# EAGLE board ESP32_Thing_Plus_UFL-Panel (EAGLE 9.6.2), part 1 of 5
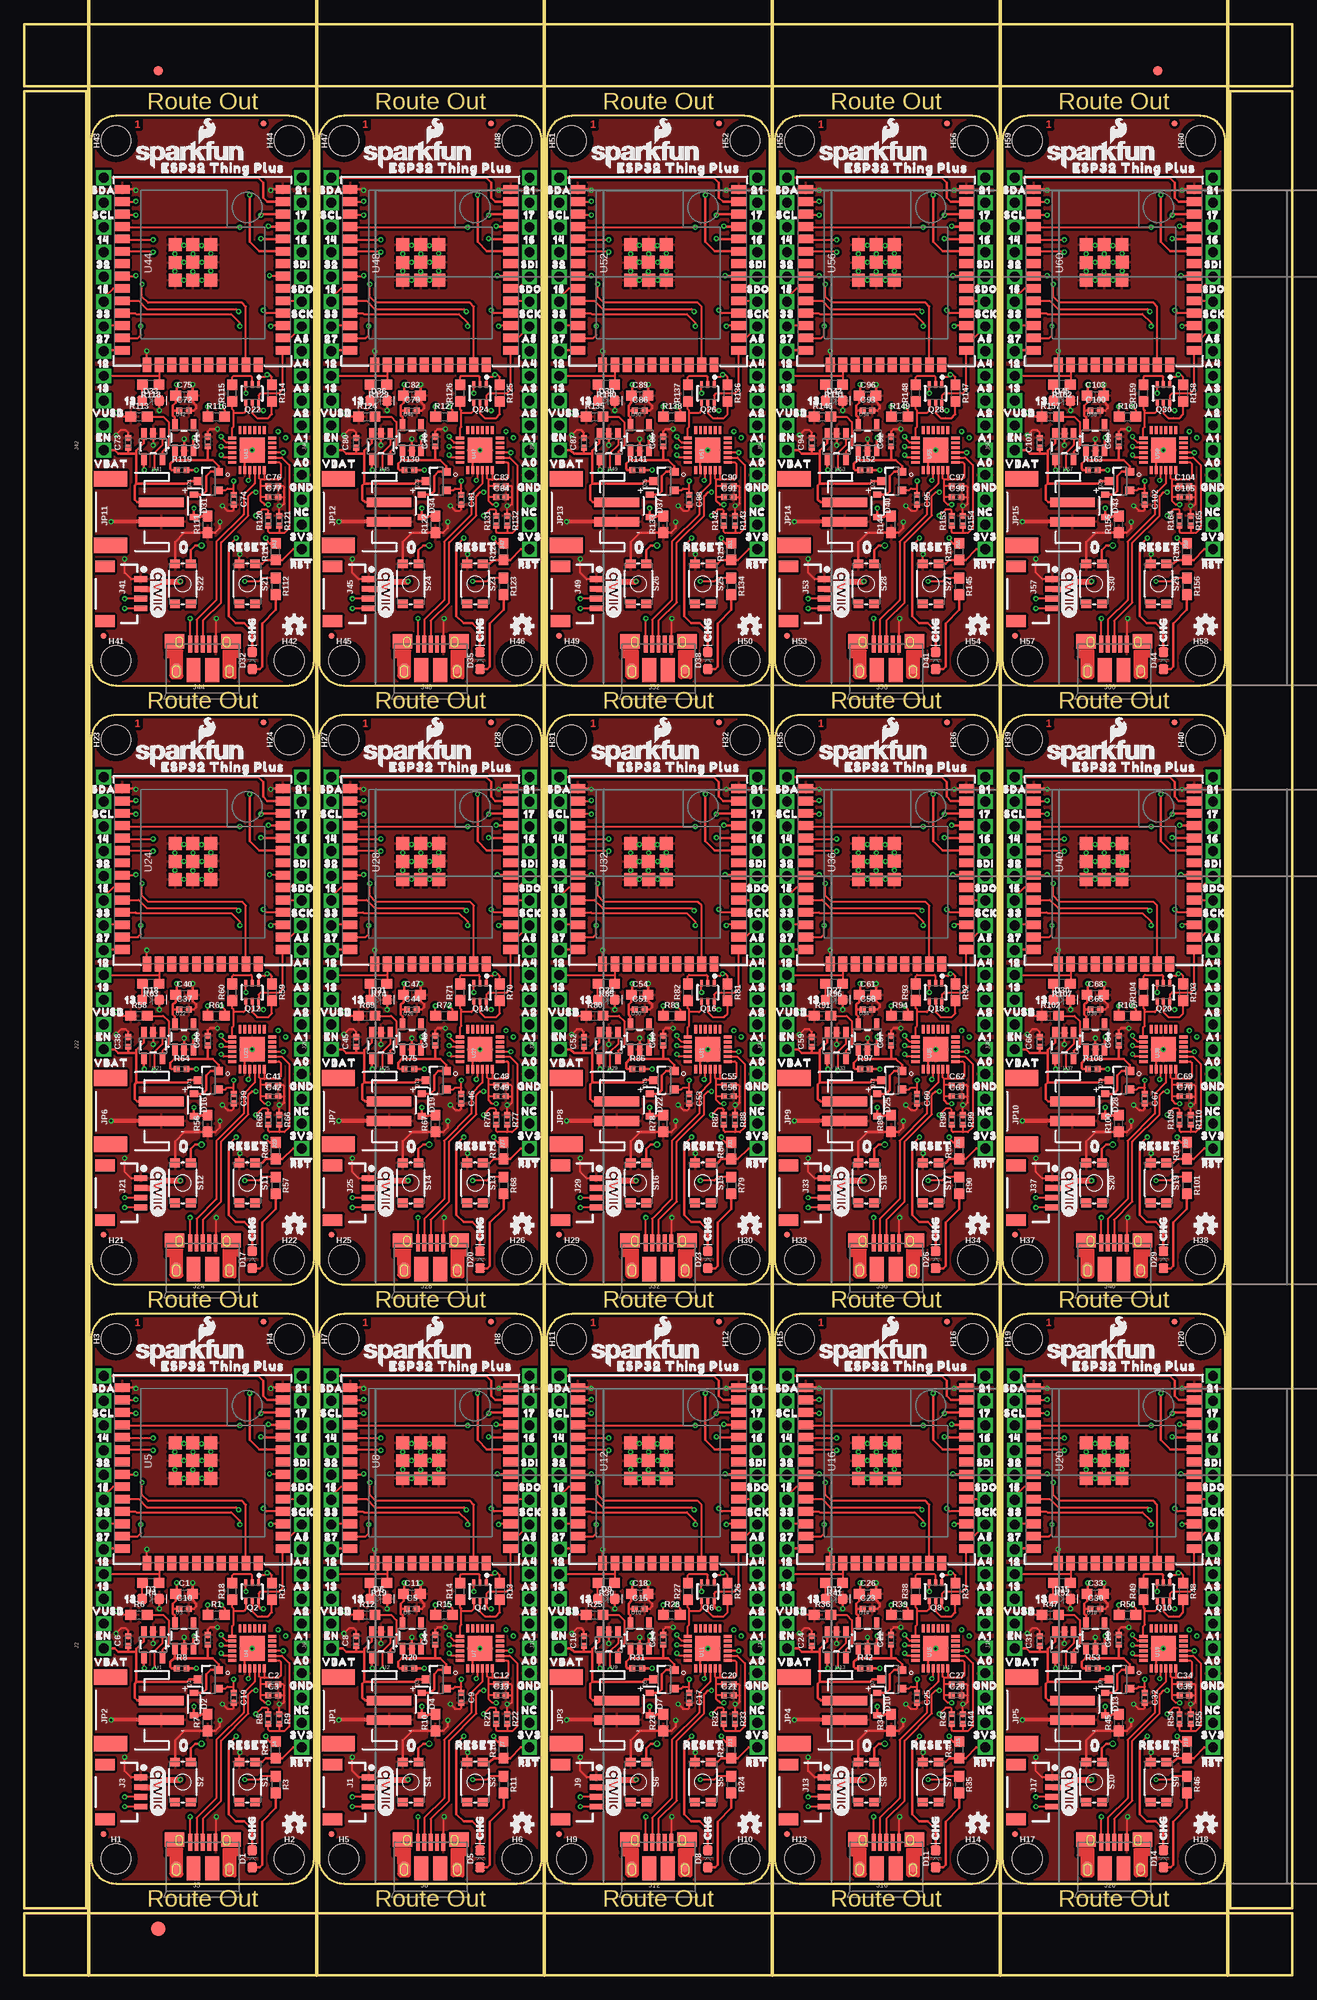
[diagram p0: board, top side]
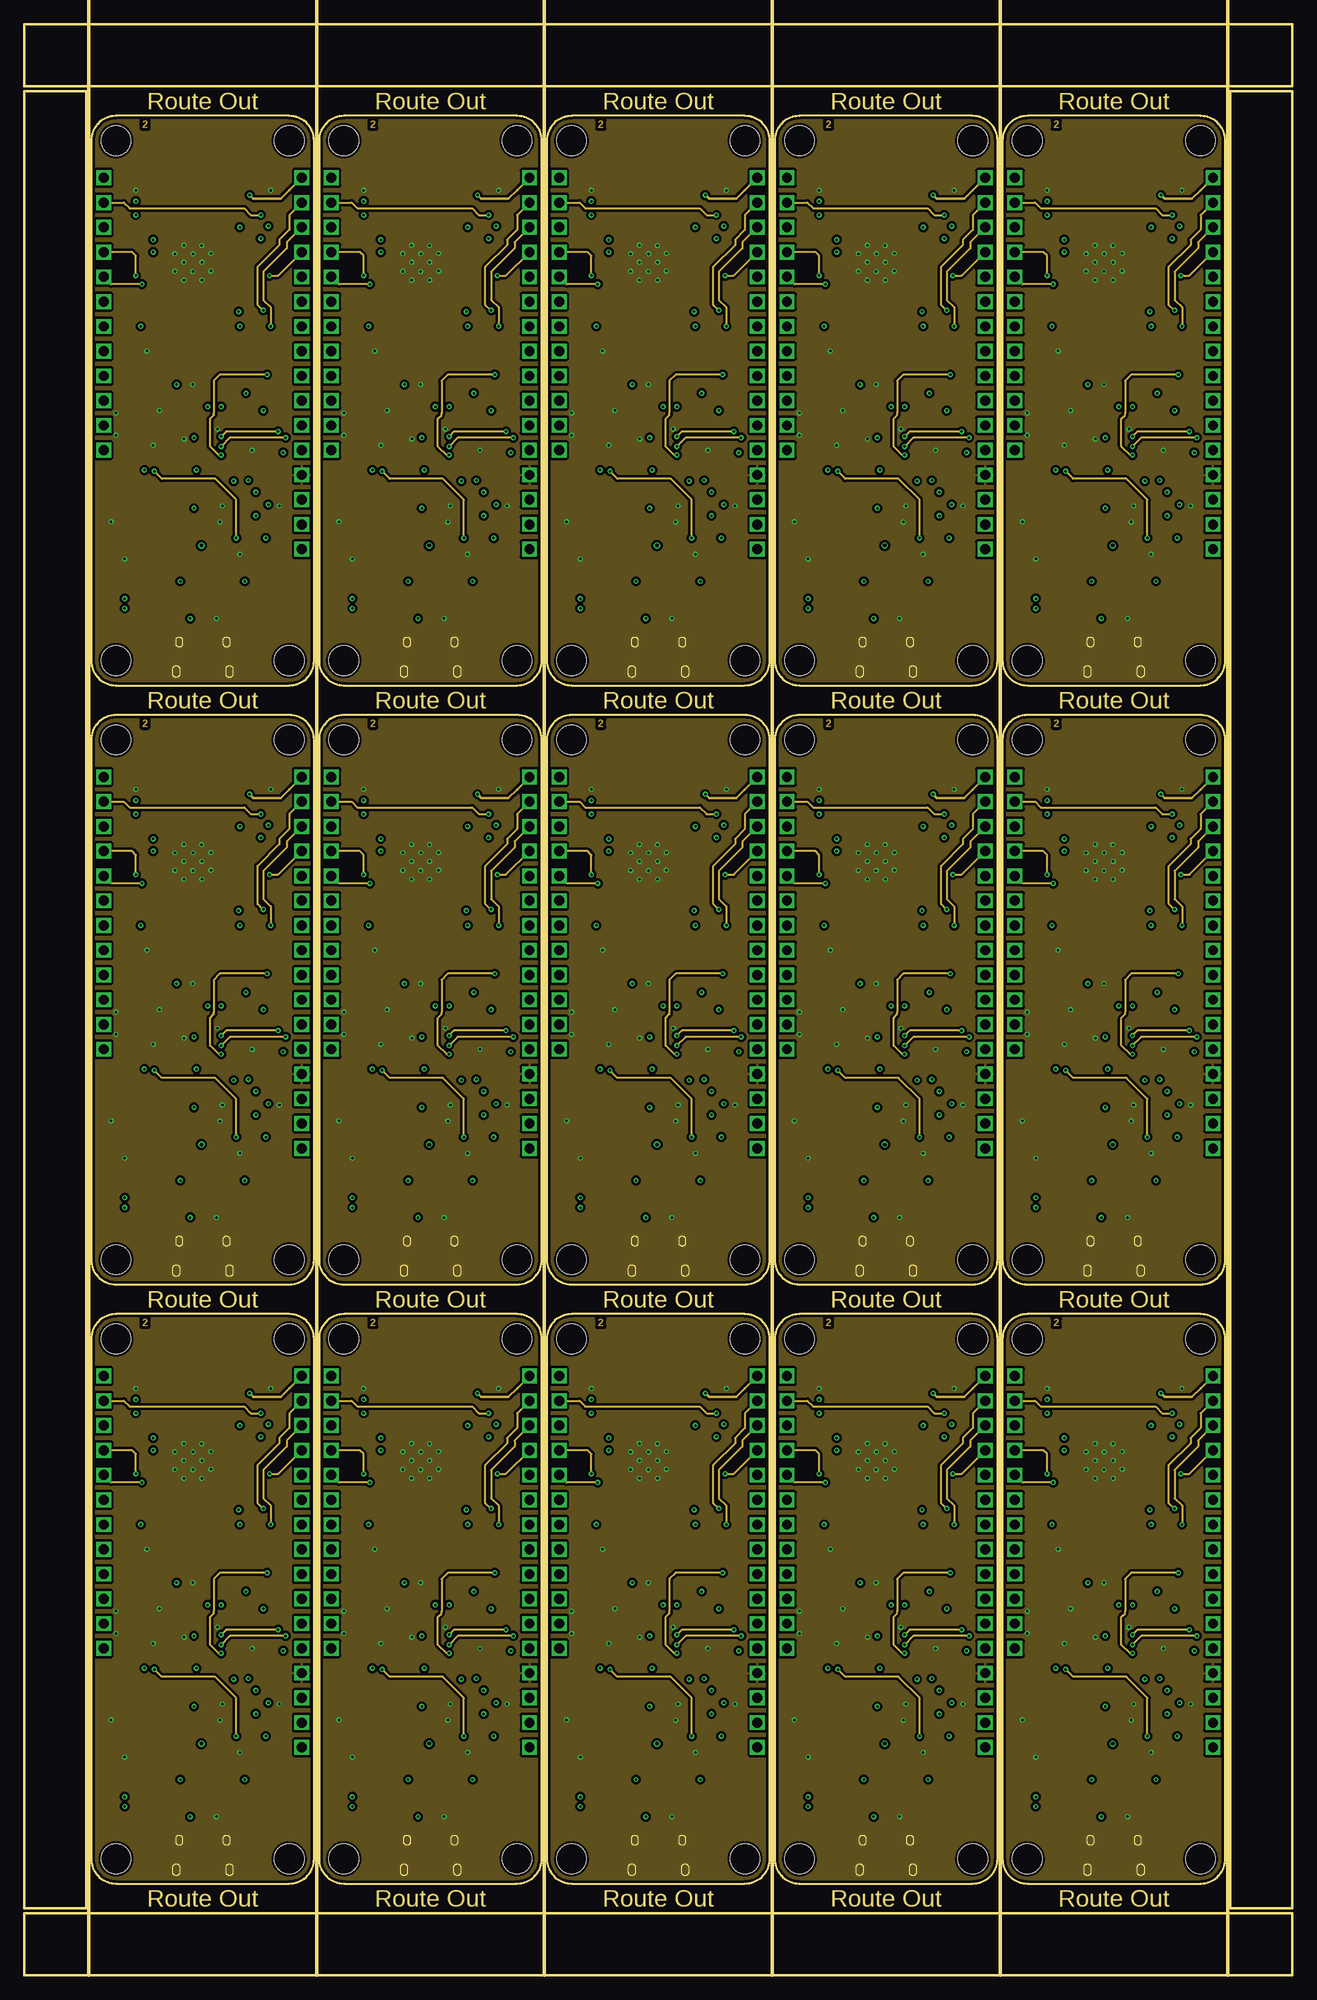
[diagram p1: board, inner layer Route2]
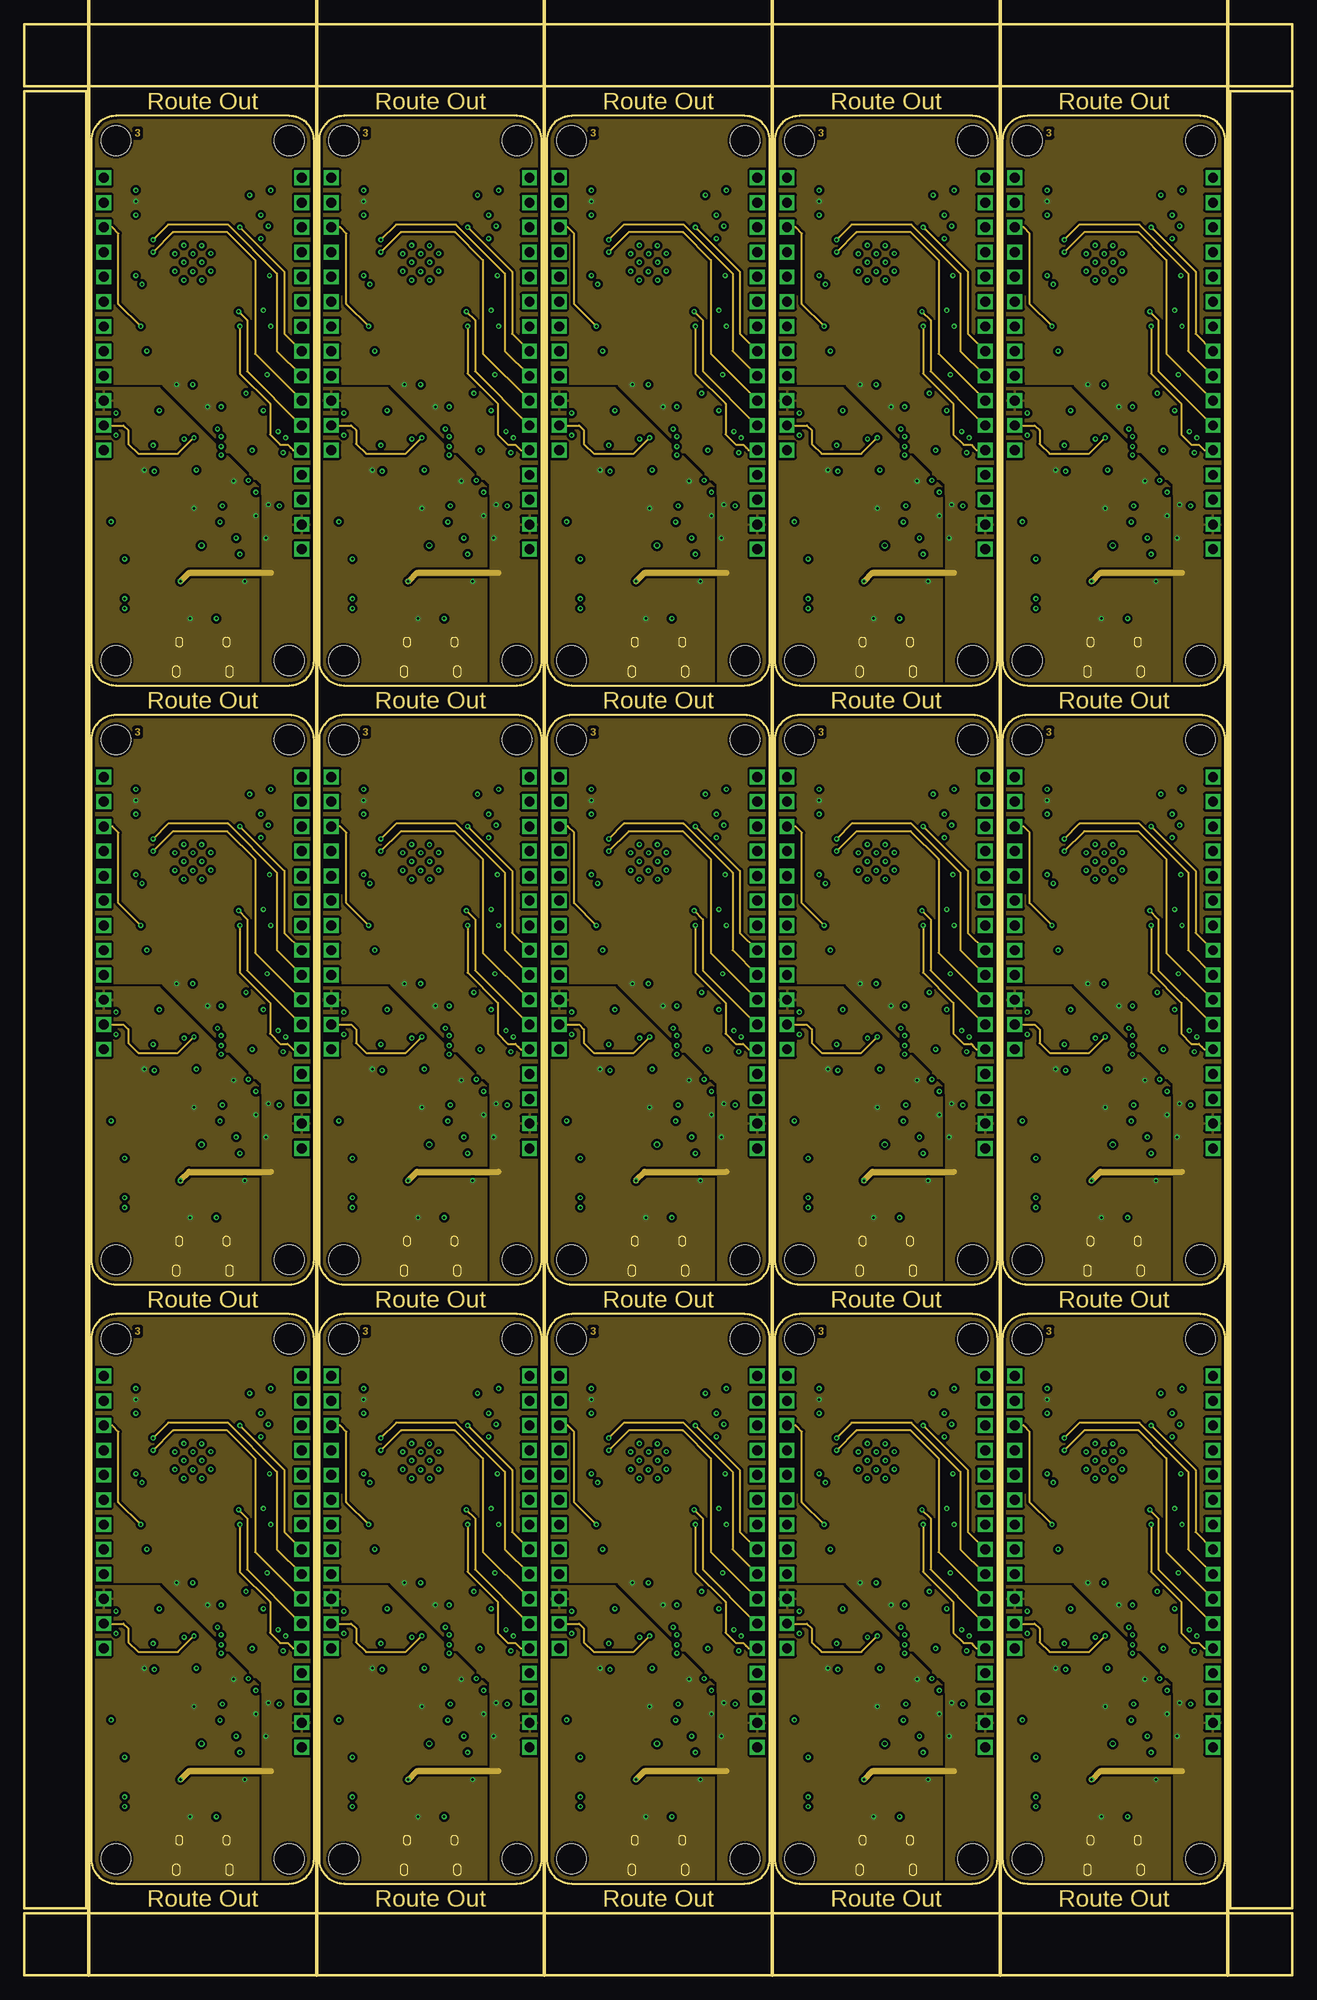
[diagram p2: board, inner layer Route15]
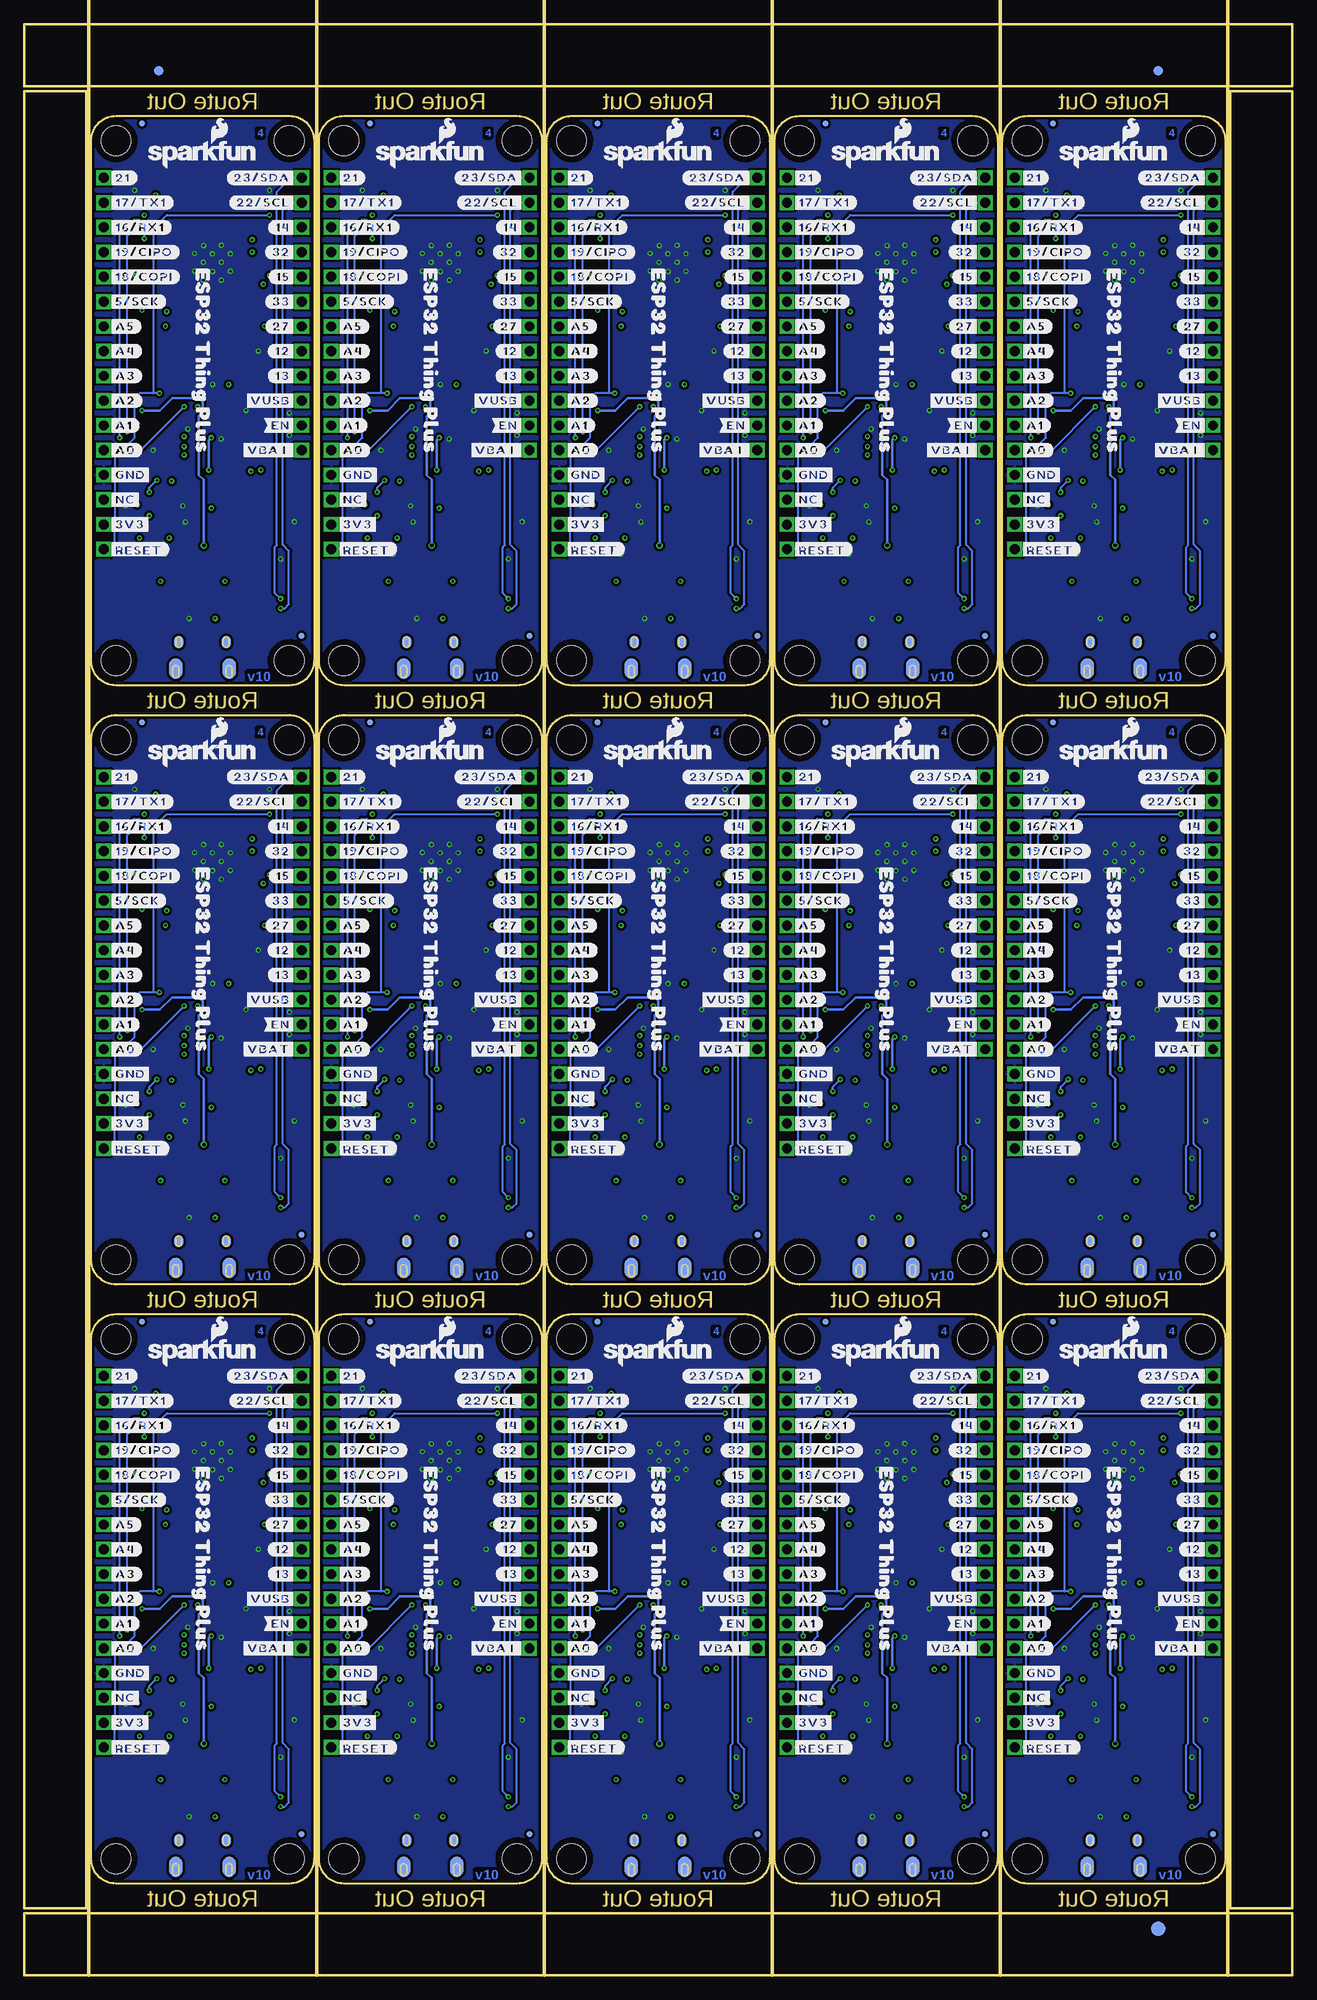
[diagram p3: board, bottom side, seen from below]

Size 130.05 x 200.15 mm. Coordinates in mm from the lower left corner, seen from the top.
Outline: 29.72,11.94 29.72,65.28 arc90 27.18,67.82 9.4,67.82 arc90 6.86,65.28 6.86,11.94 arc90 9.4,9.4 27.18,9.4 arc90 29.72,11.94
Outline: 53.09,11.94 53.09,65.28 arc90 50.55,67.82 32.77,67.82 arc90 30.23,65.28 30.23,11.94 arc90 32.77,9.4 50.55,9.4 arc90 53.09,11.94
Outline: 76.45,11.94 76.45,65.28 arc90 73.91,67.82 56.13,67.82 arc90 53.59,65.28 53.59,11.94 arc90 56.13,9.4 73.91,9.4 arc90 76.45,11.94
Outline: 99.82,11.94 99.82,65.28 arc90 97.28,67.82 79.5,67.82 arc90 76.96,65.28 76.96,11.94 arc90 79.5,9.4 97.28,9.4 arc90 99.82,11.94
Outline: 123.19,11.94 123.19,65.28 arc90 120.65,67.82 102.87,67.82 arc90 100.33,65.28 100.33,11.94 arc90 102.87,9.4 120.65,9.4 arc90 123.19,11.94
Outline: 29.72,73.41 29.72,126.75 arc90 27.18,129.29 9.4,129.29 arc90 6.86,126.75 6.86,73.41 arc90 9.4,70.87 27.18,70.87 arc90 29.72,73.41
Outline: 53.09,73.41 53.09,126.75 arc90 50.55,129.29 32.77,129.29 arc90 30.23,126.75 30.23,73.41 arc90 32.77,70.87 50.55,70.87 arc90 53.09,73.41
Outline: 76.45,73.41 76.45,126.75 arc90 73.91,129.29 56.13,129.29 arc90 53.59,126.75 53.59,73.41 arc90 56.13,70.87 73.91,70.87 arc90 76.45,73.41
Outline: 99.82,73.41 99.82,126.75 arc90 97.28,129.29 79.5,129.29 arc90 76.96,126.75 76.96,73.41 arc90 79.5,70.87 97.28,70.87 arc90 99.82,73.41
Outline: 123.19,73.41 123.19,126.75 arc90 120.65,129.29 102.87,129.29 arc90 100.33,126.75 100.33,73.41 arc90 102.87,70.87 120.65,70.87 arc90 123.19,73.41
Outline: 29.72,134.87 29.72,188.21 arc90 27.18,190.75 9.4,190.75 arc90 6.86,188.21 6.86,134.87 arc90 9.4,132.33 27.18,132.33 arc90 29.72,134.87
Outline: 53.09,134.87 53.09,188.21 arc90 50.55,190.75 32.77,190.75 arc90 30.23,188.21 30.23,134.87 arc90 32.77,132.33 50.55,132.33 arc90 53.09,134.87
Outline: 76.45,134.87 76.45,188.21 arc90 73.91,190.75 56.13,190.75 arc90 53.59,188.21 53.59,134.87 arc90 56.13,132.33 73.91,132.33 arc90 76.45,134.87
Outline: 99.82,134.87 99.82,188.21 arc90 97.28,190.75 79.5,190.75 arc90 76.96,188.21 76.96,134.87 arc90 79.5,132.33 97.28,132.33 arc90 99.82,134.87
Outline: 123.19,134.87 123.19,188.21 arc90 120.65,190.75 102.87,190.75 arc90 100.33,188.21 100.33,134.87 arc90 102.87,132.33 120.65,132.33 arc90 123.19,134.87
Outline: 0,6.35 130.05,6.35 130.05,0 0,0 0,6.35
Outline: 123.7,193.29 130.05,193.29 130.05,6.86 123.7,6.86 123.7,193.29
Outline: 0,200.15 130.05,200.15 130.05,193.8 0,193.8 0,200.15
Outline: 0,193.29 6.35,193.29 6.35,6.86 0,6.86 0,193.29
Copper layers (1*2*15*16): Top 0.035559375mm / dielectric 0.47751875mm / Route2 0.035559375mm / dielectric 0.47751875mm / Route15 0.035559375mm / dielectric 0.47751875mm / Bottom 0.035559375mm
Design rules "ESP32_Thing_Plus_UFL": minimum track width 4mil, minimum drill 6mil, track to track 5mil, track to pad 5mil, pad to pad 5mil, via to via 5mil, smd to smd 5mil, copper to edge 4mil, drill to drill 4mil, minimum pad ring 5mil, minimum via ring 5mil, stop-mask expansion 4mil, vias tented up to drill 25mil, thermal gap 10mil
Milling: 6 lines

## Footprints (pad centres in the part's own frame; a part is rotated, then mirrored left to right if it is on the bottom)
0603 = smd 1.1 x 1: 1 -0.85,0; 2 0.85,0
0402-TIGHT = smd 0.6 x 0.6: 1 -0.5,0; 2 0.5,0
LED-0603 = smd 1 x 1: A -0.877,0; C 0.877,0
SOD-323 = smd 0.63 x 0.83: A 1.15,0; C -1.15,0
FIDUCIAL-1X2 = smd 1 x 1: 1 0,0
FIDUCIAL-1.5X3 = smd 1.5 x 1.5: 1 0,0
FIDUCIAL-MICRO = smd 0.635 x 0.635: 1 0,0
STAND-OFF-TIGHT = hole 3.048: 0,0
1X04_1MM_RA = smd 0.6 x 1.35: 1 -1.5,0; 2 -0.5,0; 3 0.5,0; 4 1.5,0 | smd 1.2 x 2: NC1 2.8,-3.675; NC2 -2.8,-3.675
1X12_SM_SQ_NOSILK = drill 1.016 pad 1.27 square: 1 0,0; 2 2.54,0; 3 5.08,0; 4 7.62,0; 5 10.16,0; 6 12.7,0; 7 15.24,0; 8 17.78,0; 9 20.32,0; 10 22.86,0; 11 25.4,0; 12 27.94,0
1X16_SM_SQ_NOSILK = drill 1.016 pad 1.27 square: 1 0,0; 2 2.54,0; 3 5.08,0; 4 7.62,0; 5 10.16,0; 6 12.7,0; 7 15.24,0; 8 17.78,0; 9 20.32,0; 10 22.86,0; 11 25.4,0; 12 27.94,0; 13 30.48,0; 14 33.02,0; 15 35.56,0; 16 38.1,0
USB-MICROB-PTH-MILL = smd 0.4 x 1.75: D+ 0,0; D- -0.65,0; GND 1.3,0; ID 0.65,0; VBUS -1.3,0 | smd 2 x 1.46: SHIELD -2.9,0.275; SHIELD2 2.9,0.275 | smd 1.425 x 2.5: SHIELD3 -0.963,-2.675; SHIELD4 0.963,-2.675 | smd 1.4 x 2.1 bottom: SHIELD5 -2.731,-2.531; SHIELD7 2.729,-2.531 | smd 1 x 1: SHIELD6 2.7,-2.575 | smd 1.1 x 1.5: SHIELD8 -2.731,-2.731 | smd 1 x 1.3 bottom: SHIELD9 -2.43,0.195; SHIELD10 2.43,0.195
JST-2-SMD = smd 1 x 4.6: 1 -1,-3.7; 2 1,-3.7 | smd 1.6 x 3.4: NC1 -3.4,1.5; NC2 3.4,1.5
SOT23-3@1 = smd 0.8 x 0.9: 1 -0.95,-1; 2 0.95,-1; 3 0,1.1
SC70-6 = smd 0.3 x 0.66: 1 -0.65,-0.92; 2 0,-0.92; 3 0.65,-0.92; 4 0.65,0.92; 5 0,0.92; 6 -0.65,0.92
TACTILE_SWITCH_SMD_4.6X2.8MM = smd 0.9 x 1: 1 -2.05,-0.8; 2 2.05,-0.8; 3 2.05,0.8; 4 -2.05,0.8
TP_15TH = drill 0.381 pad 0.61: P$1 0,0
SOT23-5 = smd 0.55 x 1.2: 1 -0.95,-1.3; 2 0,-1.3; 3 0.95,-1.3; 4 0.95,1.3; 5 -0.95,1.3
QFN24 = smd 0.85 x 0.3: 1 -2.05,1.25; 2 -2.05,0.75; 3 -2.05,0.25; 4 -2.05,-0.25; 5 -2.05,-0.75; 6 -2.05,-1.25; 13 2.05,-1.25; 14 2.05,-0.75; 15 2.05,-0.25; 16 2.05,0.25; 17 2.05,0.75; 18 2.05,1.25 | smd 0.3 x 0.85: 7 -1.25,-2.05; 8 -0.75,-2.05; 9 -0.25,-2.05; 10 0.25,-2.05; 11 0.75,-2.05; 12 1.25,-2.05; 19 1.25,2.05; 20 0.75,2.05; 21 0.25,2.05; 22 -0.25,2.05; 23 -0.75,2.05; 24 -1.25,2.05 | smd 2.55 x 2.55: PAD 0,0
ESP-WROOM-32EU-NARROW = smd 0.9 x 1.5: 1 6.43,8.238; 2 5.16,8.238; 3 3.89,8.238; 4 2.62,8.238; 5 1.35,8.238; 6 0.08,8.238; 7 -1.19,8.238; 8 -2.46,8.238; 9 -3.73,8.238; 10 -5,8.238; 11 -6.27,8.238; 12 -7.54,8.238; 13 -8.81,8.238; 14 -10.08,8.238; 25 -10.08,-8.238; 26 -8.81,-8.238; 27 -7.54,-8.238; 28 -6.27,-8.238; 29 -5,-8.238; 30 -3.73,-8.238; 31 -2.46,-8.238; 32 -1.19,-8.238; 33 0.08,-8.238; 34 1.35,-8.238; 35 2.62,-8.238; 36 3.89,-8.238; 37 5.16,-8.238; 38 6.43,-8.238 | smd 1.5 x 0.9: 15 -11.57,5.715; 16 -11.57,4.445; 17 -11.57,3.175; 18 -11.57,1.905; 19 -11.57,0.635; 20 -11.57,-0.635; 21 -11.57,-1.905; 22 -11.57,-3.175; 23 -11.57,-4.445; 24 -11.57,-5.715 | smd 1.33 x 1.33: GND -1.051,1.015; P$1 0.77,-0.83; P$2 0.77,1; P$3 0.77,2.83; P$4 -1.06,2.83; P$5 -1.03,-0.84; P$6 -2.89,-0.83; P$7 -2.9,1; P$8 -2.89,2.83

## Placement (x,y rotation side)
C1  10uF  [0603]  16.38,39.12 0 top
C2  0.1uF  [0402-TIGHT]  25.53,29.84 0 top
C3  4.7uF  [0402-TIGHT]  25.53,28.7 0 top
C4  1.0uF  [0402-TIGHT]  42.16,34.42 90 top
C5  1.0uF  [0402-TIGHT]  39.75,37.59 0 top
C6  4.7uF  [0402-TIGHT]  10.67,34.29 90 top
C7  1.0uF  [0402-TIGHT]  18.8,34.42 90 top
C8  4.7uF  [0402-TIGHT]  34.04,34.29 90 top
C9  4.7uF  [0402-TIGHT]  44.83,28.45 270 top
C10  1.0uF  [0402-TIGHT]  16.38,37.59 0 top
C11  10uF  [0603]  39.75,39.12 0 top
C12  0.1uF  [0402-TIGHT]  48.89,29.84 0 top
C13  4.7uF  [0402-TIGHT]  48.89,28.7 0 top
C14  1.0uF  [0402-TIGHT]  65.53,34.42 90 top
C15  1.0uF  [0402-TIGHT]  63.12,37.59 0 top
C16  4.7uF  [0402-TIGHT]  57.4,34.29 90 top
C17  4.7uF  [0402-TIGHT]  68.2,28.45 270 top
C18  10uF  [0603]  63.12,39.12 0 top
C19  4.7uF  [0402-TIGHT]  21.46,28.45 270 top
C20  0.1uF  [0402-TIGHT]  72.26,29.84 0 top
C21  4.7uF  [0402-TIGHT]  72.26,28.7 0 top
C22  1.0uF  [0402-TIGHT]  88.9,34.42 90 top
C23  1.0uF  [0402-TIGHT]  86.49,37.59 0 top
C24  4.7uF  [0402-TIGHT]  80.77,34.29 90 top
C25  4.7uF  [0402-TIGHT]  91.57,28.45 270 top
C26  10uF  [0603]  86.49,39.12 0 top
C27  0.1uF  [0402-TIGHT]  95.63,29.84 0 top
C28  4.7uF  [0402-TIGHT]  95.63,28.7 0 top
C29  1.0uF  [0402-TIGHT]  112.27,34.42 90 top
C30  1.0uF  [0402-TIGHT]  109.86,37.59 0 top
C31  4.7uF  [0402-TIGHT]  104.14,34.29 90 top
C32  4.7uF  [0402-TIGHT]  114.94,28.45 270 top
C33  10uF  [0603]  109.86,39.12 0 top
C34  0.1uF  [0402-TIGHT]  119,29.84 0 top
C35  4.7uF  [0402-TIGHT]  119,28.7 0 top
C36  1.0uF  [0402-TIGHT]  18.8,95.88 90 top
C37  1.0uF  [0402-TIGHT]  16.38,99.06 0 top
C38  4.7uF  [0402-TIGHT]  10.67,95.76 90 top
C39  4.7uF  [0402-TIGHT]  21.46,89.92 270 top
C40  10uF  [0603]  16.38,100.58 0 top
C41  0.1uF  [0402-TIGHT]  25.53,91.31 0 top
C42  4.7uF  [0402-TIGHT]  25.53,90.17 0 top
C43  1.0uF  [0402-TIGHT]  42.16,95.88 90 top
C44  1.0uF  [0402-TIGHT]  39.75,99.06 0 top
C45  4.7uF  [0402-TIGHT]  34.04,95.76 90 top
C46  4.7uF  [0402-TIGHT]  44.83,89.92 270 top
C47  10uF  [0603]  39.75,100.58 0 top
C48  0.1uF  [0402-TIGHT]  48.89,91.31 0 top
C49  4.7uF  [0402-TIGHT]  48.89,90.17 0 top
C50  1.0uF  [0402-TIGHT]  65.53,95.88 90 top
C51  1.0uF  [0402-TIGHT]  63.12,99.06 0 top
C52  4.7uF  [0402-TIGHT]  57.4,95.76 90 top
C53  4.7uF  [0402-TIGHT]  68.2,89.92 270 top
C54  10uF  [0603]  63.12,100.58 0 top
C55  0.1uF  [0402-TIGHT]  72.26,91.31 0 top
C56  4.7uF  [0402-TIGHT]  72.26,90.17 0 top
C57  1.0uF  [0402-TIGHT]  88.9,95.88 90 top
C58  1.0uF  [0402-TIGHT]  86.49,99.06 0 top
C59  4.7uF  [0402-TIGHT]  80.77,95.76 90 top
C60  4.7uF  [0402-TIGHT]  91.57,89.92 270 top
C61  10uF  [0603]  86.49,100.58 0 top
C62  0.1uF  [0402-TIGHT]  95.63,91.31 0 top
C63  4.7uF  [0402-TIGHT]  95.63,90.17 0 top
C64  1.0uF  [0402-TIGHT]  112.27,95.88 90 top
C65  1.0uF  [0402-TIGHT]  109.86,99.06 0 top
C66  4.7uF  [0402-TIGHT]  104.14,95.76 90 top
C67  4.7uF  [0402-TIGHT]  114.94,89.92 270 top
C68  10uF  [0603]  109.86,100.58 0 top
C69  0.1uF  [0402-TIGHT]  119,91.31 0 top
C70  4.7uF  [0402-TIGHT]  119,90.17 0 top
C71  1.0uF  [0402-TIGHT]  18.8,157.35 90 top
C72  1.0uF  [0402-TIGHT]  16.38,160.53 0 top
C73  4.7uF  [0402-TIGHT]  10.67,157.23 90 top
C74  4.7uF  [0402-TIGHT]  21.46,151.38 270 top
C75  10uF  [0603]  16.38,162.05 0 top
C76  0.1uF  [0402-TIGHT]  25.53,152.78 0 top
C77  4.7uF  [0402-TIGHT]  25.53,151.64 0 top
C78  1.0uF  [0402-TIGHT]  42.16,157.35 90 top
C79  1.0uF  [0402-TIGHT]  39.75,160.53 0 top
C80  4.7uF  [0402-TIGHT]  34.04,157.23 90 top
C81  4.7uF  [0402-TIGHT]  44.83,151.38 270 top
C82  10uF  [0603]  39.75,162.05 0 top
C83  0.1uF  [0402-TIGHT]  48.89,152.78 0 top
C84  4.7uF  [0402-TIGHT]  48.89,151.64 0 top
C85  1.0uF  [0402-TIGHT]  65.53,157.35 90 top
C86  1.0uF  [0402-TIGHT]  63.12,160.53 0 top
C87  4.7uF  [0402-TIGHT]  57.4,157.23 90 top
C88  4.7uF  [0402-TIGHT]  68.2,151.38 270 top
C89  10uF  [0603]  63.12,162.05 0 top
C90  0.1uF  [0402-TIGHT]  72.26,152.78 0 top
C91  4.7uF  [0402-TIGHT]  72.26,151.64 0 top
C92  1.0uF  [0402-TIGHT]  88.9,157.35 90 top
C93  1.0uF  [0402-TIGHT]  86.49,160.53 0 top
C94  4.7uF  [0402-TIGHT]  80.77,157.23 90 top
C95  4.7uF  [0402-TIGHT]  91.57,151.38 270 top
C96  10uF  [0603]  86.49,162.05 0 top
C97  0.1uF  [0402-TIGHT]  95.63,152.78 0 top
C98  4.7uF  [0402-TIGHT]  95.63,151.64 0 top
C99  1.0uF  [0402-TIGHT]  112.27,157.35 90 top
C100  1.0uF  [0402-TIGHT]  109.86,160.53 0 top
C101  4.7uF  [0402-TIGHT]  104.14,157.23 90 top
C102  4.7uF  [0402-TIGHT]  114.94,151.38 270 top
C103  10uF  [0603]  109.86,162.05 0 top
C104  0.1uF  [0402-TIGHT]  119,152.78 0 top
C105  4.7uF  [0402-TIGHT]  119,151.64 0 top
D1  Yellow  [LED-0603]  23.37,11.94 90 top
D2  1A/23V/620mV  [SOD-323]  17.4,27.81 270 top
D3  BLUE  [LED-0603]  12.95,38.61 0 top
D4  1A/23V/620mV  [SOD-323]  40.77,27.81 270 top
D5  Yellow  [LED-0603]  46.74,11.94 90 top
D6  BLUE  [LED-0603]  36.32,38.61 0 top
D7  1A/23V/620mV  [SOD-323]  64.14,27.81 270 top
D8  Yellow  [LED-0603]  70.1,11.94 90 top
D9  BLUE  [LED-0603]  59.69,38.61 0 top
D10  1A/23V/620mV  [SOD-323]  87.5,27.81 270 top
D11  Yellow  [LED-0603]  93.47,11.94 90 top
D12  BLUE  [LED-0603]  83.06,38.61 0 top
D13  1A/23V/620mV  [SOD-323]  110.87,27.81 270 top
D14  Yellow  [LED-0603]  116.84,11.94 90 top
D15  BLUE  [LED-0603]  106.43,38.61 0 top
D16  1A/23V/620mV  [SOD-323]  17.4,89.28 270 top
D17  Yellow  [LED-0603]  23.37,73.41 90 top
D18  BLUE  [LED-0603]  12.95,100.08 0 top
D19  1A/23V/620mV  [SOD-323]  40.77,89.28 270 top
D20  Yellow  [LED-0603]  46.74,73.41 90 top
D21  BLUE  [LED-0603]  36.32,100.08 0 top
D22  1A/23V/620mV  [SOD-323]  64.14,89.28 270 top
D23  Yellow  [LED-0603]  70.1,73.41 90 top
D24  BLUE  [LED-0603]  59.69,100.08 0 top
D25  1A/23V/620mV  [SOD-323]  87.5,89.28 270 top
D26  Yellow  [LED-0603]  93.47,73.41 90 top
D27  BLUE  [LED-0603]  83.06,100.08 0 top
D28  1A/23V/620mV  [SOD-323]  110.87,89.28 270 top
D29  Yellow  [LED-0603]  116.84,73.41 90 top
D30  BLUE  [LED-0603]  106.43,100.08 0 top
D31  1A/23V/620mV  [SOD-323]  17.4,150.75 270 top
D32  Yellow  [LED-0603]  23.37,134.87 90 top
D33  BLUE  [LED-0603]  12.95,161.54 0 top
D34  1A/23V/620mV  [SOD-323]  40.77,150.75 270 top
D35  Yellow  [LED-0603]  46.74,134.87 90 top
D36  BLUE  [LED-0603]  36.32,161.54 0 top
D37  1A/23V/620mV  [SOD-323]  64.14,150.75 270 top
D38  Yellow  [LED-0603]  70.1,134.87 90 top
D39  BLUE  [LED-0603]  59.69,161.54 0 top
D40  1A/23V/620mV  [SOD-323]  87.5,150.75 270 top
D41  Yellow  [LED-0603]  93.47,134.87 90 top
D42  BLUE  [LED-0603]  83.06,161.54 0 top
D43  1A/23V/620mV  [SOD-323]  110.87,150.75 270 top
D44  Yellow  [LED-0603]  116.84,134.87 90 top
D45  BLUE  [LED-0603]  106.43,161.54 0 top
E$1  [FIDUCIAL-1X2]  13.72,195.39 0 top
E$2  [FIDUCIAL-1X2]  13.72,195.39 0 bottom
E$3  [FIDUCIAL-1X2]  116.27,195.39 0 top
E$4  [FIDUCIAL-1X2]  116.27,195.39 0 bottom
E$5  [FIDUCIAL-1.5X3]  13.72,4.76 0 top
E$6  [FIDUCIAL-1.5X3]  13.72,4.76 0 bottom
FD1  FIDUCIALUFIDUCIAL  [FIDUCIAL-MICRO]  24.51,67.06 0 top
FD2  FIDUCIALUFIDUCIAL  [FIDUCIAL-MICRO]  24.51,67.06 0 bottom
FD3  FIDUCIALUFIDUCIAL  [FIDUCIAL-MICRO]  8.13,14.48 0 top
FD4  FIDUCIALUFIDUCIAL  [FIDUCIAL-MICRO]  8.13,14.48 0 bottom
FD5  FIDUCIALUFIDUCIAL  [FIDUCIAL-MICRO]  47.88,67.06 0 top
FD6  FIDUCIALUFIDUCIAL  [FIDUCIAL-MICRO]  47.88,67.06 0 bottom
FD7  FIDUCIALUFIDUCIAL  [FIDUCIAL-MICRO]  31.5,14.48 0 top
FD8  FIDUCIALUFIDUCIAL  [FIDUCIAL-MICRO]  31.5,14.48 0 bottom
FD9  FIDUCIALUFIDUCIAL  [FIDUCIAL-MICRO]  71.25,67.06 0 top
FD10  FIDUCIALUFIDUCIAL  [FIDUCIAL-MICRO]  71.25,67.06 0 bottom
FD11  FIDUCIALUFIDUCIAL  [FIDUCIAL-MICRO]  54.86,14.48 0 top
FD12  FIDUCIALUFIDUCIAL  [FIDUCIAL-MICRO]  54.86,14.48 0 bottom
FD13  FIDUCIALUFIDUCIAL  [FIDUCIAL-MICRO]  94.62,67.06 0 top
FD14  FIDUCIALUFIDUCIAL  [FIDUCIAL-MICRO]  94.62,67.06 0 bottom
FD15  FIDUCIALUFIDUCIAL  [FIDUCIAL-MICRO]  78.23,14.48 0 top
FD16  FIDUCIALUFIDUCIAL  [FIDUCIAL-MICRO]  78.23,14.48 0 bottom
FD17  FIDUCIALUFIDUCIAL  [FIDUCIAL-MICRO]  117.98,67.06 0 top
FD18  FIDUCIALUFIDUCIAL  [FIDUCIAL-MICRO]  117.98,67.06 0 bottom
FD19  FIDUCIALUFIDUCIAL  [FIDUCIAL-MICRO]  101.6,14.48 0 top
FD20  FIDUCIALUFIDUCIAL  [FIDUCIAL-MICRO]  101.6,14.48 0 bottom
FD21  FIDUCIALUFIDUCIAL  [FIDUCIAL-MICRO]  24.51,128.52 0 top
FD22  FIDUCIALUFIDUCIAL  [FIDUCIAL-MICRO]  24.51,128.52 0 bottom
FD23  FIDUCIALUFIDUCIAL  [FIDUCIAL-MICRO]  8.13,75.95 0 top
FD24  FIDUCIALUFIDUCIAL  [FIDUCIAL-MICRO]  8.13,75.95 0 bottom
FD25  FIDUCIALUFIDUCIAL  [FIDUCIAL-MICRO]  47.88,128.52 0 top
FD26  FIDUCIALUFIDUCIAL  [FIDUCIAL-MICRO]  47.88,128.52 0 bottom
FD27  FIDUCIALUFIDUCIAL  [FIDUCIAL-MICRO]  31.5,75.95 0 top
FD28  FIDUCIALUFIDUCIAL  [FIDUCIAL-MICRO]  31.5,75.95 0 bottom
FD29  FIDUCIALUFIDUCIAL  [FIDUCIAL-MICRO]  71.25,128.52 0 top
FD30  FIDUCIALUFIDUCIAL  [FIDUCIAL-MICRO]  71.25,128.52 0 bottom
FD31  FIDUCIALUFIDUCIAL  [FIDUCIAL-MICRO]  54.86,75.95 0 top
FD32  FIDUCIALUFIDUCIAL  [FIDUCIAL-MICRO]  54.86,75.95 0 bottom
FD33  FIDUCIALUFIDUCIAL  [FIDUCIAL-MICRO]  94.62,128.52 0 top
FD34  FIDUCIALUFIDUCIAL  [FIDUCIAL-MICRO]  94.62,128.52 0 bottom
FD35  FIDUCIALUFIDUCIAL  [FIDUCIAL-MICRO]  78.23,75.95 0 top
FD36  FIDUCIALUFIDUCIAL  [FIDUCIAL-MICRO]  78.23,75.95 0 bottom
FD37  FIDUCIALUFIDUCIAL  [FIDUCIAL-MICRO]  117.98,128.52 0 top
FD38  FIDUCIALUFIDUCIAL  [FIDUCIAL-MICRO]  117.98,128.52 0 bottom
FD39  FIDUCIALUFIDUCIAL  [FIDUCIAL-MICRO]  101.6,75.95 0 top
FD40  FIDUCIALUFIDUCIAL  [FIDUCIAL-MICRO]  101.6,75.95 0 bottom
FD41  FIDUCIALUFIDUCIAL  [FIDUCIAL-MICRO]  24.51,189.99 0 top
FD42  FIDUCIALUFIDUCIAL  [FIDUCIAL-MICRO]  24.51,189.99 0 bottom
FD43  FIDUCIALUFIDUCIAL  [FIDUCIAL-MICRO]  8.13,137.41 0 top
FD44  FIDUCIALUFIDUCIAL  [FIDUCIAL-MICRO]  8.13,137.41 0 bottom
FD45  FIDUCIALUFIDUCIAL  [FIDUCIAL-MICRO]  47.88,189.99 0 top
FD46  FIDUCIALUFIDUCIAL  [FIDUCIAL-MICRO]  47.88,189.99 0 bottom
FD47  FIDUCIALUFIDUCIAL  [FIDUCIAL-MICRO]  31.5,137.41 0 top
FD48  FIDUCIALUFIDUCIAL  [FIDUCIAL-MICRO]  31.5,137.41 0 bottom
FD49  FIDUCIALUFIDUCIAL  [FIDUCIAL-MICRO]  71.25,189.99 0 top
FD50  FIDUCIALUFIDUCIAL  [FIDUCIAL-MICRO]  71.25,189.99 0 bottom
FD51  FIDUCIALUFIDUCIAL  [FIDUCIAL-MICRO]  54.86,137.41 0 top
FD52  FIDUCIALUFIDUCIAL  [FIDUCIAL-MICRO]  54.86,137.41 0 bottom
FD53  FIDUCIALUFIDUCIAL  [FIDUCIAL-MICRO]  94.62,189.99 0 top
FD54  FIDUCIALUFIDUCIAL  [FIDUCIAL-MICRO]  94.62,189.99 0 bottom
FD55  FIDUCIALUFIDUCIAL  [FIDUCIAL-MICRO]  78.23,137.41 0 top
FD56  FIDUCIALUFIDUCIAL  [FIDUCIAL-MICRO]  78.23,137.41 0 bottom
FD57  FIDUCIALUFIDUCIAL  [FIDUCIAL-MICRO]  117.98,189.99 0 top
FD58  FIDUCIALUFIDUCIAL  [FIDUCIAL-MICRO]  117.98,189.99 0 bottom
FD59  FIDUCIALUFIDUCIAL  [FIDUCIAL-MICRO]  101.6,137.41 0 top
FD60  FIDUCIALUFIDUCIAL  [FIDUCIAL-MICRO]  101.6,137.41 0 bottom
H1  STAND-OFFTIGHT  [STAND-OFF-TIGHT]  9.4,11.94 0 top
H2  STAND-OFFTIGHT  [STAND-OFF-TIGHT]  27.18,11.94 0 top
H3  STAND-OFFTIGHT  [STAND-OFF-TIGHT]  9.4,65.28 90 top
H4  STAND-OFFTIGHT  [STAND-OFF-TIGHT]  27.18,65.28 90 top
H5  STAND-OFFTIGHT  [STAND-OFF-TIGHT]  32.77,11.94 0 top
H6  STAND-OFFTIGHT  [STAND-OFF-TIGHT]  50.55,11.94 0 top
H7  STAND-OFFTIGHT  [STAND-OFF-TIGHT]  32.77,65.28 90 top
H8  STAND-OFFTIGHT  [STAND-OFF-TIGHT]  50.55,65.28 90 top
H9  STAND-OFFTIGHT  [STAND-OFF-TIGHT]  56.13,11.94 0 top
H10  STAND-OFFTIGHT  [STAND-OFF-TIGHT]  73.91,11.94 0 top
H11  STAND-OFFTIGHT  [STAND-OFF-TIGHT]  56.13,65.28 90 top
H12  STAND-OFFTIGHT  [STAND-OFF-TIGHT]  73.91,65.28 90 top
H13  STAND-OFFTIGHT  [STAND-OFF-TIGHT]  79.5,11.94 0 top
H14  STAND-OFFTIGHT  [STAND-OFF-TIGHT]  97.28,11.94 0 top
H15  STAND-OFFTIGHT  [STAND-OFF-TIGHT]  79.5,65.28 90 top
H16  STAND-OFFTIGHT  [STAND-OFF-TIGHT]  97.28,65.28 90 top
H17  STAND-OFFTIGHT  [STAND-OFF-TIGHT]  102.87,11.94 0 top
H18  STAND-OFFTIGHT  [STAND-OFF-TIGHT]  120.65,11.94 0 top
H19  STAND-OFFTIGHT  [STAND-OFF-TIGHT]  102.87,65.28 90 top
H20  STAND-OFFTIGHT  [STAND-OFF-TIGHT]  120.65,65.28 90 top
H21  STAND-OFFTIGHT  [STAND-OFF-TIGHT]  9.4,73.41 0 top
H22  STAND-OFFTIGHT  [STAND-OFF-TIGHT]  27.18,73.41 0 top
H23  STAND-OFFTIGHT  [STAND-OFF-TIGHT]  9.4,126.75 90 top
H24  STAND-OFFTIGHT  [STAND-OFF-TIGHT]  27.18,126.75 90 top
H25  STAND-OFFTIGHT  [STAND-OFF-TIGHT]  32.77,73.41 0 top
H26  STAND-OFFTIGHT  [STAND-OFF-TIGHT]  50.55,73.41 0 top
H27  STAND-OFFTIGHT  [STAND-OFF-TIGHT]  32.77,126.75 90 top
H28  STAND-OFFTIGHT  [STAND-OFF-TIGHT]  50.55,126.75 90 top
H29  STAND-OFFTIGHT  [STAND-OFF-TIGHT]  56.13,73.41 0 top
H30  STAND-OFFTIGHT  [STAND-OFF-TIGHT]  73.91,73.41 0 top
H31  STAND-OFFTIGHT  [STAND-OFF-TIGHT]  56.13,126.75 90 top
H32  STAND-OFFTIGHT  [STAND-OFF-TIGHT]  73.91,126.75 90 top
H33  STAND-OFFTIGHT  [STAND-OFF-TIGHT]  79.5,73.41 0 top
H34  STAND-OFFTIGHT  [STAND-OFF-TIGHT]  97.28,73.41 0 top
H35  STAND-OFFTIGHT  [STAND-OFF-TIGHT]  79.5,126.75 90 top
H36  STAND-OFFTIGHT  [STAND-OFF-TIGHT]  97.28,126.75 90 top
H37  STAND-OFFTIGHT  [STAND-OFF-TIGHT]  102.87,73.41 0 top
H38  STAND-OFFTIGHT  [STAND-OFF-TIGHT]  120.65,73.41 0 top
H39  STAND-OFFTIGHT  [STAND-OFF-TIGHT]  102.87,126.75 90 top
H40  STAND-OFFTIGHT  [STAND-OFF-TIGHT]  120.65,126.75 90 top
H41  STAND-OFFTIGHT  [STAND-OFF-TIGHT]  9.4,134.87 0 top
H42  STAND-OFFTIGHT  [STAND-OFF-TIGHT]  27.18,134.87 0 top
H43  STAND-OFFTIGHT  [STAND-OFF-TIGHT]  9.4,188.21 90 top
H44  STAND-OFFTIGHT  [STAND-OFF-TIGHT]  27.18,188.21 90 top
H45  STAND-OFFTIGHT  [STAND-OFF-TIGHT]  32.77,134.87 0 top
H46  STAND-OFFTIGHT  [STAND-OFF-TIGHT]  50.55,134.87 0 top
H47  STAND-OFFTIGHT  [STAND-OFF-TIGHT]  32.77,188.21 90 top
H48  STAND-OFFTIGHT  [STAND-OFF-TIGHT]  50.55,188.21 90 top
H49  STAND-OFFTIGHT  [STAND-OFF-TIGHT]  56.13,134.87 0 top
H50  STAND-OFFTIGHT  [STAND-OFF-TIGHT]  73.91,134.87 0 top
H51  STAND-OFFTIGHT  [STAND-OFF-TIGHT]  56.13,188.21 90 top
H52  STAND-OFFTIGHT  [STAND-OFF-TIGHT]  73.91,188.21 90 top
H53  STAND-OFFTIGHT  [STAND-OFF-TIGHT]  79.5,134.87 0 top
H54  STAND-OFFTIGHT  [STAND-OFF-TIGHT]  97.28,134.87 0 top
H55  STAND-OFFTIGHT  [STAND-OFF-TIGHT]  79.5,188.21 90 top
H56  STAND-OFFTIGHT  [STAND-OFF-TIGHT]  97.28,188.21 90 top
H57  STAND-OFFTIGHT  [STAND-OFF-TIGHT]  102.87,134.87 0 top
H58  STAND-OFFTIGHT  [STAND-OFF-TIGHT]  120.65,134.87 0 top
H59  STAND-OFFTIGHT  [STAND-OFF-TIGHT]  102.87,188.21 90 top
H60  STAND-OFFTIGHT  [STAND-OFF-TIGHT]  120.65,188.21 90 top
J1  [1X04_1MM_RA]  35.31,18.8 270 top
J2  [1X12_SM_SQ_NOSILK]  8.13,33.53 90 top
J3  [1X04_1MM_RA]  11.94,18.8 270 top
J4  [1X16_SM_SQ_NOSILK]  28.45,23.37 90 top
J5  [USB-MICROB-PTH-MILL]  18.31,13.64 0 top
J6  [1X12_SM_SQ_NOSILK]  31.5,33.53 90 top
J7  [1X16_SM_SQ_NOSILK]  51.82,23.37 90 top
J8  [USB-MICROB-PTH-MILL]  41.68,13.64 0 top
J9  [1X04_1MM_RA]  58.67,18.8 270 top
J10  [1X12_SM_SQ_NOSILK]  54.86,33.53 90 top
J11  [1X16_SM_SQ_NOSILK]  75.18,23.37 90 top
J12  [USB-MICROB-PTH-MILL]  65.05,13.64 0 top
J13  [1X04_1MM_RA]  82.04,18.8 270 top
J14  [1X12_SM_SQ_NOSILK]  78.23,33.53 90 top
J15  [1X16_SM_SQ_NOSILK]  98.55,23.37 90 top
J16  [USB-MICROB-PTH-MILL]  88.41,13.64 0 top
J17  [1X04_1MM_RA]  105.41,18.8 270 top
J18  [1X12_SM_SQ_NOSILK]  101.6,33.53 90 top
J19  [1X16_SM_SQ_NOSILK]  121.92,23.37 90 top
J20  [USB-MICROB-PTH-MILL]  111.78,13.64 0 top
J21  [1X04_1MM_RA]  11.94,80.26 270 top
J22  [1X12_SM_SQ_NOSILK]  8.13,95 90 top
J23  [1X16_SM_SQ_NOSILK]  28.45,84.84 90 top
J24  [USB-MICROB-PTH-MILL]  18.31,75.11 0 top
J25  [1X04_1MM_RA]  35.31,80.26 270 top
J26  [1X12_SM_SQ_NOSILK]  31.5,95 90 top
J27  [1X16_SM_SQ_NOSILK]  51.82,84.84 90 top
J28  [USB-MICROB-PTH-MILL]  41.68,75.11 0 top
J29  [1X04_1MM_RA]  58.67,80.26 270 top
J30  [1X12_SM_SQ_NOSILK]  54.86,95 90 top
J31  [1X16_SM_SQ_NOSILK]  75.18,84.84 90 top
J32  [USB-MICROB-PTH-MILL]  65.05,75.11 0 top
J33  [1X04_1MM_RA]  82.04,80.26 270 top
J34  [1X12_SM_SQ_NOSILK]  78.23,95 90 top
J35  [1X16_SM_SQ_NOSILK]  98.55,84.84 90 top
J36  [USB-MICROB-PTH-MILL]  88.41,75.11 0 top
J37  [1X04_1MM_RA]  105.41,80.26 270 top
J38  [1X12_SM_SQ_NOSILK]  101.6,95 90 top
J39  [1X16_SM_SQ_NOSILK]  121.92,84.84 90 top
J40  [USB-MICROB-PTH-MILL]  111.78,75.11 0 top
J41  [1X04_1MM_RA]  11.94,141.73 270 top
J42  [1X12_SM_SQ_NOSILK]  8.13,156.46 90 top
J43  [1X16_SM_SQ_NOSILK]  28.45,146.3 90 top
J44  [USB-MICROB-PTH-MILL]  18.31,136.58 0 top
J45  [1X04_1MM_RA]  35.31,141.73 270 top
J46  [1X12_SM_SQ_NOSILK]  31.5,156.46 90 top
J47  [1X16_SM_SQ_NOSILK]  51.82,146.3 90 top
J48  [USB-MICROB-PTH-MILL]  41.68,136.58 0 top
J49  [1X04_1MM_RA]  58.67,141.73 270 top
J50  [1X12_SM_SQ_NOSILK]  54.86,156.46 90 top
J51  [1X16_SM_SQ_NOSILK]  75.18,146.3 90 top
J52  [USB-MICROB-PTH-MILL]  65.05,136.58 0 top
J53  [1X04_1MM_RA]  82.04,141.73 270 top
J54  [1X12_SM_SQ_NOSILK]  78.23,156.46 90 top
J55  [1X16_SM_SQ_NOSILK]  98.55,146.3 90 top
J56  [USB-MICROB-PTH-MILL]  88.41,136.58 0 top
J57  [1X04_1MM_RA]  105.41,141.73 270 top
J58  [1X12_SM_SQ_NOSILK]  101.6,156.46 90 top
J59  [1X16_SM_SQ_NOSILK]  121.92,146.3 90 top
J60  [USB-MICROB-PTH-MILL]  111.78,136.58 0 top
JP1  LiPo  [JST-2-SMD]  33.71,27.18 90 top
JP2  LiPo  [JST-2-SMD]  10.34,27.18 90 top
JP3  LiPo  [JST-2-SMD]  57.07,27.18 90 top
JP4  LiPo  [JST-2-SMD]  80.44,27.18 90 top
JP5  LiPo  [JST-2-SMD]  103.81,27.18 90 top
JP6  LiPo  [JST-2-SMD]  10.34,88.65 90 top
JP7  LiPo  [JST-2-SMD]  33.71,88.65 90 top
JP8  LiPo  [JST-2-SMD]  57.07,88.65 90 top
JP9  LiPo  [JST-2-SMD]  80.44,88.65 90 top
JP10  LiPo  [JST-2-SMD]  103.81,88.65 90 top
JP11  LiPo  [JST-2-SMD]  10.34,150.11 90 top
JP12  LiPo  [JST-2-SMD]  33.71,150.11 90 top
JP13  LiPo  [JST-2-SMD]  57.07,150.11 90 top
JP14  LiPo  [JST-2-SMD]  80.44,150.11 90 top
JP15  LiPo  [JST-2-SMD]  103.81,150.11 90 top
LOGO1  OSHW-LOGOMINI  [OSHW-LOGO-MINI]  51.05,15.49 0 top
LOGO2  OSHW-LOGOMINI  [OSHW-LOGO-MINI]  27.69,15.49 0 top
LOGO3  SFE_LOGO_NAME_FLAME.1_INCH  [SFE_LOGO_NAME_FLAME_.1]  18.29,63.88 0 bottom
LOGO4  FOUR_LAYER_WARNING  [FOUR_LAYER_WARNING]  37.34,48.77 0 top
LOGO5  SFE_LOGO_NAME_FLAME.1_INCH  [SFE_LOGO_NAME_FLAME_.1]  17.02,63.88 0 top
LOGO6  QWIIC_LOGO_5MM  [QWIIC_5MM]  13.72,18.92 270 top
LOGO7  SFE_LOGO_NAME_FLAME.1_INCH  [SFE_LOGO_NAME_FLAME_.1]  41.66,63.88 0 bottom
LOGO8  FOUR_LAYER_WARNING  [FOUR_LAYER_WARNING]  60.71,48.77 0 top
LOGO9  SFE_LOGO_NAME_FLAME.1_INCH  [SFE_LOGO_NAME_FLAME_.1]  40.39,63.88 0 top
LOGO10  QWIIC_LOGO_5MM  [QWIIC_5MM]  37.08,18.92 270 top
LOGO11  OSHW-LOGOMINI  [OSHW-LOGO-MINI]  74.42,15.49 0 top
LOGO12  SFE_LOGO_NAME_FLAME.1_INCH  [SFE_LOGO_NAME_FLAME_.1]  65.02,63.88 0 bottom
LOGO13  FOUR_LAYER_WARNING  [FOUR_LAYER_WARNING]  84.07,48.77 0 top
LOGO14  SFE_LOGO_NAME_FLAME.1_INCH  [SFE_LOGO_NAME_FLAME_.1]  63.75,63.88 0 top
LOGO15  QWIIC_LOGO_5MM  [QWIIC_5MM]  60.45,18.92 270 top
LOGO16  OSHW-LOGOMINI  [OSHW-LOGO-MINI]  97.79,15.49 0 top
LOGO17  SFE_LOGO_NAME_FLAME.1_INCH  [SFE_LOGO_NAME_FLAME_.1]  88.39,63.88 0 bottom
LOGO18  FOUR_LAYER_WARNING  [FOUR_LAYER_WARNING]  107.44,48.77 0 top
LOGO19  SFE_LOGO_NAME_FLAME.1_INCH  [SFE_LOGO_NAME_FLAME_.1]  87.12,63.88 0 top
LOGO20  QWIIC_LOGO_5MM  [QWIIC_5MM]  83.82,18.92 270 top
LOGO21  OSHW-LOGOMINI  [OSHW-LOGO-MINI]  121.16,15.49 0 top
LOGO22  SFE_LOGO_NAME_FLAME.1_INCH  [SFE_LOGO_NAME_FLAME_.1]  111.76,63.88 0 bottom
LOGO23  FOUR_LAYER_WARNING  [FOUR_LAYER_WARNING]  130.81,48.77 0 top
LOGO24  SFE_LOGO_NAME_FLAME.1_INCH  [SFE_LOGO_NAME_FLAME_.1]  110.49,63.88 0 top
LOGO25  QWIIC_LOGO_5MM  [QWIIC_5MM]  107.19,18.92 270 top
LOGO26  OSHW-LOGOMINI  [OSHW-LOGO-MINI]  27.69,76.96 0 top
LOGO27  SFE_LOGO_NAME_FLAME.1_INCH  [SFE_LOGO_NAME_FLAME_.1]  18.29,125.35 0 bottom
LOGO28  FOUR_LAYER_WARNING  [FOUR_LAYER_WARNING]  37.34,110.24 0 top
LOGO29  SFE_LOGO_NAME_FLAME.1_INCH  [SFE_LOGO_NAME_FLAME_.1]  17.02,125.35 0 top
LOGO30  QWIIC_LOGO_5MM  [QWIIC_5MM]  13.72,80.39 270 top
LOGO31  OSHW-LOGOMINI  [OSHW-LOGO-MINI]  51.05,76.96 0 top
LOGO32  SFE_LOGO_NAME_FLAME.1_INCH  [SFE_LOGO_NAME_FLAME_.1]  41.66,125.35 0 bottom
LOGO33  FOUR_LAYER_WARNING  [FOUR_LAYER_WARNING]  60.71,110.24 0 top
LOGO34  SFE_LOGO_NAME_FLAME.1_INCH  [SFE_LOGO_NAME_FLAME_.1]  40.39,125.35 0 top
LOGO35  QWIIC_LOGO_5MM  [QWIIC_5MM]  37.08,80.39 270 top
LOGO36  OSHW-LOGOMINI  [OSHW-LOGO-MINI]  74.42,76.96 0 top
LOGO37  SFE_LOGO_NAME_FLAME.1_INCH  [SFE_LOGO_NAME_FLAME_.1]  65.02,125.35 0 bottom
LOGO38  FOUR_LAYER_WARNING  [FOUR_LAYER_WARNING]  84.07,110.24 0 top
LOGO39  SFE_LOGO_NAME_FLAME.1_INCH  [SFE_LOGO_NAME_FLAME_.1]  63.75,125.35 0 top
LOGO40  QWIIC_LOGO_5MM  [QWIIC_5MM]  60.45,80.39 270 top
LOGO41  OSHW-LOGOMINI  [OSHW-LOGO-MINI]  97.79,76.96 0 top
LOGO42  SFE_LOGO_NAME_FLAME.1_INCH  [SFE_LOGO_NAME_FLAME_.1]  88.39,125.35 0 bottom
LOGO43  FOUR_LAYER_WARNING  [FOUR_LAYER_WARNING]  107.44,110.24 0 top
LOGO44  SFE_LOGO_NAME_FLAME.1_INCH  [SFE_LOGO_NAME_FLAME_.1]  87.12,125.35 0 top
LOGO45  QWIIC_LOGO_5MM  [QWIIC_5MM]  83.82,80.39 270 top
LOGO46  OSHW-LOGOMINI  [OSHW-LOGO-MINI]  121.16,76.96 0 top
LOGO47  SFE_LOGO_NAME_FLAME.1_INCH  [SFE_LOGO_NAME_FLAME_.1]  111.76,125.35 0 bottom
LOGO48  FOUR_LAYER_WARNING  [FOUR_LAYER_WARNING]  130.81,110.24 0 top
LOGO49  SFE_LOGO_NAME_FLAME.1_INCH  [SFE_LOGO_NAME_FLAME_.1]  110.49,125.35 0 top
LOGO50  QWIIC_LOGO_5MM  [QWIIC_5MM]  107.19,80.39 270 top
LOGO51  OSHW-LOGOMINI  [OSHW-LOGO-MINI]  27.69,138.43 0 top
LOGO52  SFE_LOGO_NAME_FLAME.1_INCH  [SFE_LOGO_NAME_FLAME_.1]  18.29,186.82 0 bottom
LOGO53  FOUR_LAYER_WARNING  [FOUR_LAYER_WARNING]  37.34,171.7 0 top
LOGO54  SFE_LOGO_NAME_FLAME.1_INCH  [SFE_LOGO_NAME_FLAME_.1]  17.02,186.82 0 top
LOGO55  QWIIC_LOGO_5MM  [QWIIC_5MM]  13.72,141.86 270 top
LOGO56  OSHW-LOGOMINI  [OSHW-LOGO-MINI]  51.05,138.43 0 top
LOGO57  SFE_LOGO_NAME_FLAME.1_INCH  [SFE_LOGO_NAME_FLAME_.1]  41.66,186.82 0 bottom
LOGO58  FOUR_LAYER_WARNING  [FOUR_LAYER_WARNING]  60.71,171.7 0 top
LOGO59  SFE_LOGO_NAME_FLAME.1_INCH  [SFE_LOGO_NAME_FLAME_.1]  40.39,186.82 0 top
LOGO60  QWIIC_LOGO_5MM  [QWIIC_5MM]  37.08,141.86 270 top
LOGO61  OSHW-LOGOMINI  [OSHW-LOGO-MINI]  74.42,138.43 0 top
LOGO62  SFE_LOGO_NAME_FLAME.1_INCH  [SFE_LOGO_NAME_FLAME_.1]  65.02,186.82 0 bottom
LOGO63  FOUR_LAYER_WARNING  [FOUR_LAYER_WARNING]  84.07,171.7 0 top
LOGO64  SFE_LOGO_NAME_FLAME.1_INCH  [SFE_LOGO_NAME_FLAME_.1]  63.75,186.82 0 top
LOGO65  QWIIC_LOGO_5MM  [QWIIC_5MM]  60.45,141.86 270 top
LOGO66  OSHW-LOGOMINI  [OSHW-LOGO-MINI]  97.79,138.43 0 top
LOGO67  SFE_LOGO_NAME_FLAME.1_INCH  [SFE_LOGO_NAME_FLAME_.1]  88.39,186.82 0 bottom
LOGO68  FOUR_LAYER_WARNING  [FOUR_LAYER_WARNING]  107.44,171.7 0 top
LOGO69  SFE_LOGO_NAME_FLAME.1_INCH  [SFE_LOGO_NAME_FLAME_.1]  87.12,186.82 0 top
LOGO70  QWIIC_LOGO_5MM  [QWIIC_5MM]  83.82,141.86 270 top
LOGO71  OSHW-LOGOMINI  [OSHW-LOGO-MINI]  121.16,138.43 0 top
LOGO72  SFE_LOGO_NAME_FLAME.1_INCH  [SFE_LOGO_NAME_FLAME_.1]  111.76,186.82 0 bottom
LOGO73  FOUR_LAYER_WARNING  [FOUR_LAYER_WARNING]  130.81,171.7 0 top
LOGO74  SFE_LOGO_NAME_FLAME.1_INCH  [SFE_LOGO_NAME_FLAME_.1]  110.49,186.82 0 top
LOGO75  QWIIC_LOGO_5MM  [QWIIC_5MM]  107.19,141.86 270 top
Q1  2.5A/30V  [SOT23-3@1]  18.92,30.35 90 top
Q2  MBT3904DW1T1  [SC70-6]  23.37,39.37 180 top
Q3  2.5A/30V  [SOT23-3@1]  42.29,30.35 90 top
Q4  MBT3904DW1T1  [SC70-6]  46.74,39.37 180 top
Q5  2.5A/30V  [SOT23-3@1]  65.66,30.35 90 top
Q6  MBT3904DW1T1  [SC70-6]  70.1,39.37 180 top
Q7  2.5A/30V  [SOT23-3@1]  89.03,30.35 90 top
Q8  MBT3904DW1T1  [SC70-6]  93.47,39.37 180 top
Q9  2.5A/30V  [SOT23-3@1]  112.4,30.35 90 top
Q10  MBT3904DW1T1  [SC70-6]  116.84,39.37 180 top
Q11  2.5A/30V  [SOT23-3@1]  18.92,91.82 90 top
Q12  MBT3904DW1T1  [SC70-6]  23.37,100.84 180 top
Q13  2.5A/30V  [SOT23-3@1]  42.29,91.82 90 top
Q14  MBT3904DW1T1  [SC70-6]  46.74,100.84 180 top
Q15  2.5A/30V  [SOT23-3@1]  65.66,91.82 90 top
Q16  MBT3904DW1T1  [SC70-6]  70.1,100.84 180 top
Q17  2.5A/30V  [SOT23-3@1]  89.03,91.82 90 top
Q18  MBT3904DW1T1  [SC70-6]  93.47,100.84 180 top
Q19  2.5A/30V  [SOT23-3@1]  112.4,91.82 90 top
Q20  MBT3904DW1T1  [SC70-6]  116.84,100.84 180 top
Q21  2.5A/30V  [SOT23-3@1]  18.92,153.29 90 top
Q22  MBT3904DW1T1  [SC70-6]  23.37,162.31 180 top
Q23  2.5A/30V  [SOT23-3@1]  42.29,153.29 90 top
Q24  MBT3904DW1T1  [SC70-6]  46.74,162.31 180 top
Q25  2.5A/30V  [SOT23-3@1]  65.66,153.29 90 top
Q26  MBT3904DW1T1  [SC70-6]  70.1,162.31 180 top
Q27  2.5A/30V  [SOT23-3@1]  89.03,153.29 90 top
Q28  MBT3904DW1T1  [SC70-6]  93.47,162.31 180 top
Q29  2.5A/30V  [SOT23-3@1]  112.4,153.29 90 top
Q30  MBT3904DW1T1  [SC70-6]  116.84,162.31 180 top
R1  10k  [0603]  19.68,36.96 0 top
R2  10k  [0603]  25.78,23.11 90 top
R3  1K  [0603]  25.78,19.56 270 top
R4  1k  [0603]  12.95,40.26 180 top
R5  22k  [0402-TIGHT]  25.02,26.29 90 top
R6  2.0k  [0603]  11.76,36.96 0 top
R7  10k  [0603]  18.8,25.91 90 top
R8  100k  [0402-TIGHT]  16.13,31.5 0 top
R9  33k  [0402-TIGHT]  26.16,26.29 270 top
R10  10k  [0603]  42.16,25.91 90 top
R11  1K  [0603]  49.15,19.56 270 top
R12  2.0k  [0603]  35.13,36.96 0 top
R13  10k  [0603]  48.77,39.37 270 top
R14  10k  [0603]  44.7,39.37 90 top
R15  10k  [0603]  43.05,36.96 0 top
R16  10k  [0603]  49.15,23.11 90 top
R17  10k  [0603]  25.4,39.37 270 top
R18  10k  [0603]  21.34,39.37 90 top
R19  1k  [0603]  36.32,40.26 180 top
R20  100k  [0402-TIGHT]  39.5,31.5 0 top
R21  22k  [0402-TIGHT]  48.39,26.29 90 top
R22  33k  [0402-TIGHT]  49.53,26.29 270 top
R23  10k  [0603]  65.53,25.91 90 top
R24  1K  [0603]  72.52,19.56 270 top
R25  2.0k  [0603]  58.5,36.96 0 top
R26  10k  [0603]  72.14,39.37 270 top
R27  10k  [0603]  68.07,39.37 90 top
R28  10k  [0603]  66.42,36.96 0 top
R29  10k  [0603]  72.52,23.11 90 top
R30  1k  [0603]  59.69,40.26 180 top
R31  100k  [0402-TIGHT]  62.86,31.5 0 top
R32  22k  [0402-TIGHT]  71.76,26.29 90 top
R33  33k  [0402-TIGHT]  72.9,26.29 270 top
R34  10k  [0603]  88.9,25.91 90 top
R35  1K  [0603]  95.89,19.56 270 top
R36  2.0k  [0603]  81.86,36.96 0 top
R37  10k  [0603]  95.5,39.37 270 top
R38  10k  [0603]  91.44,39.37 90 top
R39  10k  [0603]  89.79,36.96 0 top
R40  10k  [0603]  95.89,23.11 90 top
R41  1k  [0603]  83.06,40.26 180 top
R42  100k  [0402-TIGHT]  86.23,31.5 0 top
R43  22k  [0402-TIGHT]  95.12,26.29 90 top
R44  33k  [0402-TIGHT]  96.27,26.29 270 top
R45  10k  [0603]  112.27,25.91 90 top
R46  1K  [0603]  119.25,19.56 270 top
R47  2.0k  [0603]  105.23,36.96 0 top
R48  10k  [0603]  118.87,39.37 270 top
R49  10k  [0603]  114.81,39.37 90 top
R50  10k  [0603]  113.16,36.96 0 top
R51  10k  [0603]  119.25,23.11 90 top
R52  1k  [0603]  106.43,40.26 180 top
R53  100k  [0402-TIGHT]  109.6,31.5 0 top
R54  22k  [0402-TIGHT]  118.49,26.29 90 top
R55  33k  [0402-TIGHT]  119.63,26.29 270 top
R56  10k  [0603]  18.8,87.38 90 top
R57  1K  [0603]  25.78,81.03 270 top
R58  2.0k  [0603]  11.76,98.42 0 top
R59  10k  [0603]  25.4,100.84 270 top
R60  10k  [0603]  21.34,100.84 90 top
R61  10k  [0603]  19.68,98.42 0 top
R62  10k  [0603]  25.78,84.58 90 top
R63  1k  [0603]  12.95,101.73 180 top
R64  100k  [0402-TIGHT]  16.13,92.96 0 top
R65  22k  [0402-TIGHT]  25.02,87.76 90 top
R66  33k  [0402-TIGHT]  26.16,87.76 270 top
R67  10k  [0603]  42.16,87.38 90 top
R68  1K  [0603]  49.15,81.03 270 top
R69  2.0k  [0603]  35.13,98.42 0 top
R70  10k  [0603]  48.77,100.84 270 top
R71  10k  [0603]  44.7,100.84 90 top
R72  10k  [0603]  43.05,98.42 0 top
R73  10k  [0603]  49.15,84.58 90 top
R74  1k  [0603]  36.32,101.73 180 top
R75  100k  [0402-TIGHT]  39.5,92.96 0 top
R76  22k  [0402-TIGHT]  48.39,87.76 90 top
R77  33k  [0402-TIGHT]  49.53,87.76 270 top
R78  10k  [0603]  65.53,87.38 90 top
R79  1K  [0603]  72.52,81.03 270 top
R80  2.0k  [0603]  58.5,98.42 0 top
R81  10k  [0603]  72.14,100.84 270 top
R82  10k  [0603]  68.07,100.84 90 top
R83  10k  [0603]  66.42,98.42 0 top
R84  10k  [0603]  72.52,84.58 90 top
R85  1k  [0603]  59.69,101.73 180 top
R86  100k  [0402-TIGHT]  62.86,92.96 0 top
R87  22k  [0402-TIGHT]  71.76,87.76 90 top
R88  33k  [0402-TIGHT]  72.9,87.76 270 top
R89  10k  [0603]  88.9,87.38 90 top
R90  1K  [0603]  95.89,81.03 270 top
R91  2.0k  [0603]  81.86,98.42 0 top
R92  10k  [0603]  95.5,100.84 270 top
R93  10k  [0603]  91.44,100.84 90 top
R94  10k  [0603]  89.79,98.42 0 top
R95  10k  [0603]  95.89,84.58 90 top
R96  1k  [0603]  83.06,101.73 180 top
R97  100k  [0402-TIGHT]  86.23,92.96 0 top
R98  22k  [0402-TIGHT]  95.12,87.76 90 top
R99  33k  [0402-TIGHT]  96.27,87.76 270 top
R100  10k  [0603]  112.27,87.38 90 top
R101  1K  [0603]  119.25,81.03 270 top
R102  2.0k  [0603]  105.23,98.42 0 top
R103  10k  [0603]  118.87,100.84 270 top
R104  10k  [0603]  114.81,100.84 90 top
R105  10k  [0603]  113.16,98.42 0 top
R106  10k  [0603]  119.25,84.58 90 top
R107  1k  [0603]  106.43,101.73 180 top
R108  100k  [0402-TIGHT]  109.6,92.96 0 top
R109  22k  [0402-TIGHT]  118.49,87.76 90 top
R110  33k  [0402-TIGHT]  119.63,87.76 270 top
R111  10k  [0603]  18.8,148.84 90 top
R112  1K  [0603]  25.78,142.49 270 top
R113  2.0k  [0603]  11.76,159.89 0 top
R114  10k  [0603]  25.4,162.31 270 top
R115  10k  [0603]  21.34,162.31 90 top
R116  10k  [0603]  19.68,159.89 0 top
R117  10k  [0603]  25.78,146.05 90 top
R118  1k  [0603]  12.95,163.19 180 top
R119  100k  [0402-TIGHT]  16.13,154.43 0 top
R120  22k  [0402-TIGHT]  25.02,149.22 90 top
R121  33k  [0402-TIGHT]  26.16,149.22 270 top
R122  10k  [0603]  42.16,148.84 90 top
R123  1K  [0603]  49.15,142.49 270 top
R124  2.0k  [0603]  35.13,159.89 0 top
R125  10k  [0603]  48.77,162.31 270 top
R126  10k  [0603]  44.7,162.31 90 top
R127  10k  [0603]  43.05,159.89 0 top
R128  10k  [0603]  49.15,146.05 90 top
R129  1k  [0603]  36.32,163.19 180 top
R130  100k  [0402-TIGHT]  39.5,154.43 0 top
R131  22k  [0402-TIGHT]  48.39,149.22 90 top
R132  33k  [0402-TIGHT]  49.53,149.22 270 top
R133  10k  [0603]  65.53,148.84 90 top
R134  1K  [0603]  72.52,142.49 270 top
R135  2.0k  [0603]  58.5,159.89 0 top
R136  10k  [0603]  72.14,162.31 270 top
R137  10k  [0603]  68.07,162.31 90 top
R138  10k  [0603]  66.42,159.89 0 top
R139  10k  [0603]  72.52,146.05 90 top
R140  1k  [0603]  59.69,163.19 180 top
R141  100k  [0402-TIGHT]  62.86,154.43 0 top
R142  22k  [0402-TIGHT]  71.76,149.22 90 top
R143  33k  [0402-TIGHT]  72.9,149.22 270 top
R144  10k  [0603]  88.9,148.84 90 top
R145  1K  [0603]  95.89,142.49 270 top
R146  2.0k  [0603]  81.86,159.89 0 top
R147  10k  [0603]  95.5,162.31 270 top
R148  10k  [0603]  91.44,162.31 90 top
R149  10k  [0603]  89.79,159.89 0 top
R150  10k  [0603]  95.89,146.05 90 top
R151  1k  [0603]  83.06,163.19 180 top
R152  100k  [0402-TIGHT]  86.23,154.43 0 top
R153  22k  [0402-TIGHT]  95.12,149.22 90 top
R154  33k  [0402-TIGHT]  96.27,149.22 270 top
R155  10k  [0603]  112.27,148.84 90 top
R156  1K  [0603]  119.25,142.49 270 top
R157  2.0k  [0603]  105.23,159.89 0 top
R158  10k  [0603]  118.87,162.31 270 top
R159  10k  [0603]  114.81,162.31 90 top
R160  10k  [0603]  113.16,159.89 0 top
R161  10k  [0603]  119.25,146.05 90 top
R162  1k  [0603]  106.43,163.19 180 top
R163  100k  [0402-TIGHT]  109.6,154.43 0 top
R164  22k  [0402-TIGHT]  118.49,149.22 90 top
R165  33k  [0402-TIGHT]  119.63,149.22 270 top
S1  RESET  [TACTILE_SWITCH_SMD_4.6X2.8MM]  22.86,19.81 270 top
S2  0  [TACTILE_SWITCH_SMD_4.6X2.8MM]  16.26,19.81 270 top
S3  RESET  [TACTILE_SWITCH_SMD_4.6X2.8MM]  46.23,19.81 270 top
S4  0  [TACTILE_SWITCH_SMD_4.6X2.8MM]  39.62,19.81 270 top
S5  RESET  [TACTILE_SWITCH_SMD_4.6X2.8MM]  69.6,19.81 270 top
S6  0  [TACTILE_SWITCH_SMD_4.6X2.8MM]  62.99,19.81 270 top
S7  RESET  [TACTILE_SWITCH_SMD_4.6X2.8MM]  92.96,19.81 270 top
S8  0  [TACTILE_SWITCH_SMD_4.6X2.8MM]  86.36,19.81 270 top
S9  RESET  [TACTILE_SWITCH_SMD_4.6X2.8MM]  116.33,19.81 270 top
S10  0  [TACTILE_SWITCH_SMD_4.6X2.8MM]  109.73,19.81 270 top
S11  RESET  [TACTILE_SWITCH_SMD_4.6X2.8MM]  22.86,81.28 270 top
S12  0  [TACTILE_SWITCH_SMD_4.6X2.8MM]  16.26,81.28 270 top
S13  RESET  [TACTILE_SWITCH_SMD_4.6X2.8MM]  46.23,81.28 270 top
S14  0  [TACTILE_SWITCH_SMD_4.6X2.8MM]  39.62,81.28 270 top
S15  RESET  [TACTILE_SWITCH_SMD_4.6X2.8MM]  69.6,81.28 270 top
S16  0  [TACTILE_SWITCH_SMD_4.6X2.8MM]  62.99,81.28 270 top
S17  RESET  [TACTILE_SWITCH_SMD_4.6X2.8MM]  92.96,81.28 270 top
S18  0  [TACTILE_SWITCH_SMD_4.6X2.8MM]  86.36,81.28 270 top
S19  RESET  [TACTILE_SWITCH_SMD_4.6X2.8MM]  116.33,81.28 270 top
S20  0  [TACTILE_SWITCH_SMD_4.6X2.8MM]  109.73,81.28 270 top
S21  RESET  [TACTILE_SWITCH_SMD_4.6X2.8MM]  22.86,142.75 270 top
S22  0  [TACTILE_SWITCH_SMD_4.6X2.8MM]  16.26,142.75 270 top
S23  RESET  [TACTILE_SWITCH_SMD_4.6X2.8MM]  46.23,142.75 270 top
S24  0  [TACTILE_SWITCH_SMD_4.6X2.8MM]  39.62,142.75 270 top
S25  RESET  [TACTILE_SWITCH_SMD_4.6X2.8MM]  69.6,142.75 270 top
S26  0  [TACTILE_SWITCH_SMD_4.6X2.8MM]  62.99,142.75 270 top
S27  RESET  [TACTILE_SWITCH_SMD_4.6X2.8MM]  92.96,142.75 270 top
S28  0  [TACTILE_SWITCH_SMD_4.6X2.8MM]  86.36,142.75 270 top
S29  RESET  [TACTILE_SWITCH_SMD_4.6X2.8MM]  116.33,142.75 270 top
S30  0  [TACTILE_SWITCH_SMD_4.6X2.8MM]  109.73,142.75 270 top
TP1  [TP_15TH]  18.16,23.75 0 top
TP2  [TP_15TH]  41.53,23.75 0 top
TP3  [TP_15TH]  64.9,23.75 0 top
TP4  [TP_15TH]  88.27,23.75 0 top
TP5  [TP_15TH]  111.63,23.75 0 top
TP6  [TP_15TH]  18.16,85.22 0 top
TP7  [TP_15TH]  41.53,85.22 0 top
TP8  [TP_15TH]  64.9,85.22 0 top
TP9  [TP_15TH]  88.27,85.22 0 top
TP10  [TP_15TH]  111.63,85.22 0 top
TP11  [TP_15TH]  18.16,146.69 0 top
TP12  [TP_15TH]  41.53,146.69 0 top
TP13  [TP_15TH]  64.9,146.69 0 top
TP14  [TP_15TH]  88.27,146.69 0 top
TP15  [TP_15TH]  111.63,146.69 0 top
U1  MCP73831  [SOT23-5]  13.21,33.91 180 top
U2  MCP73831  [SOT23-5]  36.58,33.91 180 top
U3  AP2112K-3.3V  [SOT23-5]  16.38,34.8 0 top
U4  CP210X  [QFN24]  23.37,33.53 90 top
U5  ESP-WROOM-32EU  [ESP-WROOM-32EU-NARROW]  18.29,53.85 90 top
U6  AP2112K-3.3V  [SOT23-5]  39.75,34.8 0 top
U7  CP210X  [QFN24]  46.74,33.53 90 top
U8  ESP-WROOM-32EU  [ESP-WROOM-32EU-NARROW]  41.66,53.85 90 top
U9  MCP73831  [SOT23-5]  59.94,33.91 180 top
U10  AP2112K-3.3V  [SOT23-5]  63.12,34.8 0 top
U11  CP210X  [QFN24]  70.1,33.53 90 top
U12  ESP-WROOM-32EU  [ESP-WROOM-32EU-NARROW]  65.02,53.85 90 top
U13  MCP73831  [SOT23-5]  83.31,33.91 180 top
U14  AP2112K-3.3V  [SOT23-5]  86.49,34.8 0 top
U15  CP210X  [QFN24]  93.47,33.53 90 top
U16  ESP-WROOM-32EU  [ESP-WROOM-32EU-NARROW]  88.39,53.85 90 top
U17  MCP73831  [SOT23-5]  106.68,33.91 180 top
U18  AP2112K-3.3V  [SOT23-5]  109.86,34.8 0 top
U19  CP210X  [QFN24]  116.84,33.53 90 top
U20  ESP-WROOM-32EU  [ESP-WROOM-32EU-NARROW]  111.76,53.85 90 top
U21  MCP73831  [SOT23-5]  13.21,95.38 180 top
U22  AP2112K-3.3V  [SOT23-5]  16.38,96.27 0 top
U23  CP210X  [QFN24]  23.37,95 90 top
U24  ESP-WROOM-32EU  [ESP-WROOM-32EU-NARROW]  18.29,115.32 90 top
U25  MCP73831  [SOT23-5]  36.58,95.38 180 top
U26  AP2112K-3.3V  [SOT23-5]  39.75,96.27 0 top
U27  CP210X  [QFN24]  46.74,95 90 top
U28  ESP-WROOM-32EU  [ESP-WROOM-32EU-NARROW]  41.66,115.32 90 top
U29  MCP73831  [SOT23-5]  59.94,95.38 180 top
U30  AP2112K-3.3V  [SOT23-5]  63.12,96.27 0 top
U31  CP210X  [QFN24]  70.1,95 90 top
U32  ESP-WROOM-32EU  [ESP-WROOM-32EU-NARROW]  65.02,115.32 90 top
U33  MCP73831  [SOT23-5]  83.31,95.38 180 top
U34  AP2112K-3.3V  [SOT23-5]  86.49,96.27 0 top
U35  CP210X  [QFN24]  93.47,95 90 top
U36  ESP-WROOM-32EU  [ESP-WROOM-32EU-NARROW]  88.39,115.32 90 top
U37  MCP73831  [SOT23-5]  106.68,95.38 180 top
U38  AP2112K-3.3V  [SOT23-5]  109.86,96.27 0 top
U39  CP210X  [QFN24]  116.84,95 90 top
U40  ESP-WROOM-32EU  [ESP-WROOM-32EU-NARROW]  111.76,115.32 90 top
U41  MCP73831  [SOT23-5]  13.21,156.84 180 top
U42  AP2112K-3.3V  [SOT23-5]  16.38,157.73 0 top
U43  CP210X  [QFN24]  23.37,156.46 90 top
U44  ESP-WROOM-32EU  [ESP-WROOM-32EU-NARROW]  18.29,176.78 90 top
U45  MCP73831  [SOT23-5]  36.58,156.84 180 top
U46  AP2112K-3.3V  [SOT23-5]  39.75,157.73 0 top
U47  CP210X  [QFN24]  46.74,156.46 90 top
U48  ESP-WROOM-32EU  [ESP-WROOM-32EU-NARROW]  41.66,176.78 90 top
U49  MCP73831  [SOT23-5]  59.94,156.84 180 top
U50  AP2112K-3.3V  [SOT23-5]  63.12,157.73 0 top
U51  CP210X  [QFN24]  70.1,156.46 90 top
U52  ESP-WROOM-32EU  [ESP-WROOM-32EU-NARROW]  65.02,176.78 90 top
U53  MCP73831  [SOT23-5]  83.31,156.84 180 top
U54  AP2112K-3.3V  [SOT23-5]  86.49,157.73 0 top
U55  CP210X  [QFN24]  93.47,156.46 90 top
U56  ESP-WROOM-32EU  [ESP-WROOM-32EU-NARROW]  88.39,176.78 90 top
U57  MCP73831  [SOT23-5]  106.68,156.84 180 top
U58  AP2112K-3.3V  [SOT23-5]  109.86,157.73 0 top
U59  CP210X  [QFN24]  116.84,156.46 90 top
U60  ESP-WROOM-32EU  [ESP-WROOM-32EU-NARROW]  111.76,176.78 90 top
U$1  [ESP32_THING_PLUS_0]  18.29,42.42 270 bottom
U$2  [SDI0]  28.47,52.58 0 top
U$3  [#21#0]  27.94,61.47 0 bottom
U$4  [#17#TX1#0]  27.94,58.93 0 bottom
U$5  [#16#RX1#0]  27.94,56.39 0 bottom
U$6  [SDO0]  28.55,50.04 0 top
U$7  [#RST#0]  28.4,21.87 0 top
U$8  [#19#CIPO#0]  27.94,53.85 0 bottom
U$9  [ORDERING_INSTRUCTIONS]  59.44,60.2 0 top
U$10  [#18#COPI#0]  27.94,51.31 0 bottom
U$11  [#5#SCK#0]  27.94,48.77 0 bottom
U$12  [#A5#0]  27.94,46.23 0 bottom
U$13  [ESP32_THING_PLUS0]  36.7,62.48 0 top
U$14  [SDA0]  31.5,60.2 0 top
U$15  [SCL0]  31.5,57.66 0 top
U$16  [140]  31.5,55.12 0 top
U$17  [320]  31.5,52.58 0 top
U$18  [150]  31.5,50.04 0 top
U$19  [#A4#0]  27.94,43.69 0 bottom
U$20  [330]  31.5,47.5 0 top
U$21  [#A3#0]  27.94,41.15 0 bottom
U$22  [#A2#0]  27.94,38.61 0 bottom
U$23  [270]  31.5,44.96 0 top
U$24  [ESP32_THING_PLUS0]  13.34,62.48 0 top
U$25  [SDA0]  8.13,60.2 0 top
U$26  [SCL0]  8.13,57.66 0 top
U$27  [#A1#0]  27.94,36.07 0 bottom
U$28  [#A0#0]  27.94,33.53 0 bottom
U$29  [120]  31.5,42.42 0 top
U$30  [130]  31.5,39.88 0 top
U$31  [#23#SDA#0]  8.64,61.47 0 bottom
U$32  [#GND#0]  27.94,30.99 0 bottom
U$33  [#22#SCL#0]  8.64,58.93 0 bottom
U$34  [#14#0]  8.64,56.39 0 bottom
U$35  [#32#0]  8.64,53.85 0 bottom
U$36  [#15#0]  8.64,51.31 0 bottom
U$37  [#33#0]  8.64,48.77 0 bottom
U$38  [#27#0]  8.64,46.23 0 bottom
U$39  [#12#0]  8.64,43.69 0 bottom
U$40  [#13#0]  8.64,41.15 0 bottom
U$41  [#VUSB#0]  8.64,38.61 0 bottom
U$42  [#VBAT#0]  8.64,33.53 0 bottom
U$43  [#EN#0]  8.64,36.07 0 bottom
U$44  [#NC#0]  27.94,28.45 0 bottom
U$45  [#3V3#0]  27.94,25.91 0 bottom
U$46  [##RESET##0]  27.94,23.37 0 bottom
U$47  [130]  34.26,38.58 0 top
U$48  [VUSB0]  31.98,37.34 0 top
U$49  [EN0]  31.5,34.82 0 top
U$50  [VBAT0]  32.28,32.13 0 top
U$51  [CHG0]  46.74,15.11 90 top
U$52  [RESET0]  46.33,23.6 0 top
U$53  [3V30]  51.82,24.64 0 top
U$54  [NC0]  51.82,27.18 0 top
U$55  [GND0]  51.82,29.72 0 top
U$56  [A00]  51.82,32.26 0 top
U$57  [A10]  51.82,34.8 0 top
U$58  [140]  8.13,55.12 0 top
U$59  [ORDERING_INSTRUCTIONS]  36.07,60.2 0 top
U$60  [A20]  51.82,37.34 0 top
U$61  [A30]  51.82,39.88 0 top
U$62  [A40]  51.82,42.42 0 top
U$63  [A50]  51.82,44.96 0 top
U$64  [SCK0]  51.92,47.5 0 top
U$65  [160]  51.82,55.12 0 top
U$66  [170]  51.82,57.66 0 top
U$67  [210]  51.82,60.2 0 top
U$68  [320]  8.13,52.58 0 top
U$69  [150]  8.13,50.04 0 top
U$70  [330]  8.13,47.5 0 top
U$71  [270]  8.13,44.96 0 top
U$72  [120]  8.13,42.42 0 top
U$73  [130]  8.13,39.88 0 top
U$74  [130]  10.9,38.58 0 top
U$75  [VUSB0]  8.61,37.34 0 top
U$76  [EN0]  8.13,34.82 0 top
U$77  [VBAT0]  8.92,32.13 0 top
U$78  [CHG0]  23.37,15.11 90 top
U$79  [RESET0]  22.96,23.6 0 top
U$80  [00]  39.78,23.55 0 top
U$81  [3V30]  28.45,24.64 0 top
U$82  [NC0]  28.45,27.18 0 top
U$83  [GND0]  28.45,29.72 0 top
U$84  [A00]  28.45,32.26 0 top
U$85  [A10]  28.45,34.8 0 top
U$86  [A20]  28.45,37.34 0 top
U$87  [A30]  28.45,39.88 0 top
U$88  [A40]  28.45,42.42 0 top
U$89  [A50]  28.45,44.96 0 top
U$90  [SCK0]  28.55,47.5 0 top
U$91  [#23#SDA#0]  32,61.47 0 bottom
U$92  [#22#SCL#0]  32,58.93 0 bottom
U$93  [160]  28.45,55.12 0 top
U$94  [170]  28.45,57.66 0 top
U$95  [210]  28.45,60.2 0 top
U$96  [00]  16.41,23.55 0 top
U$97  [#14#0]  32,56.39 0 bottom
U$98  [#32#0]  32,53.85 0 bottom
U$99  [#15#0]  32,51.31 0 bottom
U$100  [#33#0]  32,48.77 0 bottom
U$101  [#27#0]  32,46.23 0 bottom
U$102  [#12#0]  32,43.69 0 bottom
U$103  [#13#0]  32,41.15 0 bottom
U$104  [#VUSB#0]  32,38.61 0 bottom
U$105  [#VBAT#0]  32,33.53 0 bottom
U$106  [#EN#0]  32,36.07 0 bottom
U$107  [#21#0]  51.31,61.47 0 bottom
U$108  [#17#TX1#0]  51.31,58.93 0 bottom
U$109  [#16#RX1#0]  51.31,56.39 0 bottom
U$110  [#19#CIPO#0]  51.31,53.85 0 bottom
U$111  [#18#COPI#0]  51.31,51.31 0 bottom
U$112  [#5#SCK#0]  51.31,48.77 0 bottom
U$113  [#A5#0]  51.31,46.23 0 bottom
U$114  [#A4#0]  51.31,43.69 0 bottom
U$115  [#A3#0]  51.31,41.15 0 bottom
U$116  [#A2#0]  51.31,38.61 0 bottom
U$117  [#A1#0]  51.31,36.07 0 bottom
U$118  [#A0#0]  51.31,33.53 0 bottom
U$119  [#GND#0]  51.31,30.99 0 bottom
U$120  [#NC#0]  51.31,28.45 0 bottom
U$121  [#3V3#0]  51.31,25.91 0 bottom
U$122  [##RESET##0]  51.31,23.37 0 bottom
U$123  [ESP32_THING_PLUS_0]  41.66,42.42 270 bottom
U$124  [SDI0]  51.84,52.58 0 top
U$125  [SDO0]  51.92,50.04 0 top
U$126  [#RST#0]  51.77,21.87 0 top
U$127  [ORDERING_INSTRUCTIONS]  82.8,60.2 0 top
U$128  [ESP32_THING_PLUS0]  60.07,62.48 0 top
U$129  [SDA0]  54.86,60.2 0 top
U$130  [SCL0]  54.86,57.66 0 top
U$131  [140]  54.86,55.12 0 top
U$132  [320]  54.86,52.58 0 top
U$133  [150]  54.86,50.04 0 top
U$134  [330]  54.86,47.5 0 top
U$135  [270]  54.86,44.96 0 top
U$136  [120]  54.86,42.42 0 top
U$137  [130]  54.86,39.88 0 top
U$138  [130]  57.63,38.58 0 top
U$139  [VUSB0]  55.35,37.34 0 top
U$140  [EN0]  54.86,34.82 0 top
U$141  [VBAT0]  55.65,32.13 0 top
U$142  [CHG0]  70.1,15.11 90 top
U$143  [RESET0]  69.7,23.6 0 top
U$144  [3V30]  75.18,24.64 0 top
U$145  [NC0]  75.18,27.18 0 top
U$146  [GND0]  75.18,29.72 0 top
U$147  [A00]  75.18,32.26 0 top
U$148  [A10]  75.18,34.8 0 top
U$149  [A20]  75.18,37.34 0 top
U$150  [A30]  75.18,39.88 0 top
U$151  [A40]  75.18,42.42 0 top
U$152  [A50]  75.18,44.96 0 top
U$153  [SCK0]  75.29,47.5 0 top
U$154  [160]  75.18,55.12 0 top
U$155  [170]  75.18,57.66 0 top
U$156  [210]  75.18,60.2 0 top
U$157  [00]  63.14,23.55 0 top
U$158  [#23#SDA#0]  55.37,61.47 0 bottom
U$159  [#22#SCL#0]  55.37,58.93 0 bottom
U$160  [#14#0]  55.37,56.39 0 bottom
U$161  [#32#0]  55.37,53.85 0 bottom
U$162  [#15#0]  55.37,51.31 0 bottom
U$163  [#33#0]  55.37,48.77 0 bottom
U$164  [#27#0]  55.37,46.23 0 bottom
U$165  [#12#0]  55.37,43.69 0 bottom
U$166  [#13#0]  55.37,41.15 0 bottom
U$167  [#VUSB#0]  55.37,38.61 0 bottom
U$168  [#VBAT#0]  55.37,33.53 0 bottom
U$169  [#EN#0]  55.37,36.07 0 bottom
U$170  [#21#0]  74.68,61.47 0 bottom
U$171  [#17#TX1#0]  74.68,58.93 0 bottom
U$172  [#16#RX1#0]  74.68,56.39 0 bottom
U$173  [#19#CIPO#0]  74.68,53.85 0 bottom
U$174  [#18#COPI#0]  74.68,51.31 0 bottom
U$175  [#5#SCK#0]  74.68,48.77 0 bottom
U$176  [#A5#0]  74.68,46.23 0 bottom
U$177  [#A4#0]  74.68,43.69 0 bottom
U$178  [#A3#0]  74.68,41.15 0 bottom
U$179  [#A2#0]  74.68,38.61 0 bottom
U$180  [#A1#0]  74.68,36.07 0 bottom
U$181  [#A0#0]  74.68,33.53 0 bottom
U$182  [#GND#0]  74.68,30.99 0 bottom
U$183  [#NC#0]  74.68,28.45 0 bottom
U$184  [#3V3#0]  74.68,25.91 0 bottom
U$185  [##RESET##0]  74.68,23.37 0 bottom
U$186  [ESP32_THING_PLUS_0]  65.02,42.42 270 bottom
U$187  [SDI0]  75.21,52.58 0 top
U$188  [SDO0]  75.29,50.04 0 top
U$189  [#RST#0]  75.13,21.87 0 top
U$190  [ORDERING_INSTRUCTIONS]  106.17,60.2 0 top
U$191  [ESP32_THING_PLUS0]  83.44,62.48 0 top
U$192  [SDA0]  78.23,60.2 0 top
U$193  [SCL0]  78.23,57.66 0 top
U$194  [140]  78.23,55.12 0 top
U$195  [320]  78.23,52.58 0 top
U$196  [150]  78.23,50.04 0 top
U$197  [330]  78.23,47.5 0 top
U$198  [270]  78.23,44.96 0 top
U$199  [120]  78.23,42.42 0 top
U$200  [130]  78.23,39.88 0 top
U$201  [130]  81,38.58 0 top
U$202  [VUSB0]  78.71,37.34 0 top
U$203  [EN0]  78.23,34.82 0 top
U$204  [VBAT0]  79.02,32.13 0 top
U$205  [CHG0]  93.47,15.11 90 top
U$206  [RESET0]  93.07,23.6 0 top
U$207  [3V30]  98.55,24.64 0 top
U$208  [NC0]  98.55,27.18 0 top
U$209  [GND0]  98.55,29.72 0 top
U$210  [A00]  98.55,32.26 0 top
U$211  [A10]  98.55,34.8 0 top
U$212  [A20]  98.55,37.34 0 top
U$213  [A30]  98.55,39.88 0 top
U$214  [A40]  98.55,42.42 0 top
U$215  [A50]  98.55,44.96 0 top
U$216  [SCK0]  98.65,47.5 0 top
U$217  [160]  98.55,55.12 0 top
U$218  [170]  98.55,57.66 0 top
U$219  [210]  98.55,60.2 0 top
U$220  [00]  86.51,23.55 0 top
U$221  [#23#SDA#0]  78.74,61.47 0 bottom
U$222  [#22#SCL#0]  78.74,58.93 0 bottom
U$223  [#14#0]  78.74,56.39 0 bottom
U$224  [#32#0]  78.74,53.85 0 bottom
U$225  [#15#0]  78.74,51.31 0 bottom
U$226  [#33#0]  78.74,48.77 0 bottom
U$227  [#27#0]  78.74,46.23 0 bottom
U$228  [#12#0]  78.74,43.69 0 bottom
U$229  [#13#0]  78.74,41.15 0 bottom
U$230  [#VUSB#0]  78.74,38.61 0 bottom
U$231  [#VBAT#0]  78.74,33.53 0 bottom
U$232  [#EN#0]  78.74,36.07 0 bottom
U$233  [#21#0]  98.04,61.47 0 bottom
U$234  [#17#TX1#0]  98.04,58.93 0 bottom
U$235  [#16#RX1#0]  98.04,56.39 0 bottom
U$236  [#19#CIPO#0]  98.04,53.85 0 bottom
U$237  [#18#COPI#0]  98.04,51.31 0 bottom
U$238  [#5#SCK#0]  98.04,48.77 0 bottom
U$239  [#A5#0]  98.04,46.23 0 bottom
U$240  [#A4#0]  98.04,43.69 0 bottom
U$241  [#A3#0]  98.04,41.15 0 bottom
U$242  [#A2#0]  98.04,38.61 0 bottom
U$243  [#A1#0]  98.04,36.07 0 bottom
U$244  [#A0#0]  98.04,33.53 0 bottom
U$245  [#GND#0]  98.04,30.99 0 bottom
U$246  [#NC#0]  98.04,28.45 0 bottom
U$247  [#3V3#0]  98.04,25.91 0 bottom
U$248  [##RESET##0]  98.04,23.37 0 bottom
U$249  [ESP32_THING_PLUS_0]  88.39,42.42 270 bottom
U$250  [SDI0]  98.58,52.58 0 top
U$251  [SDO0]  98.65,50.04 0 top
U$252  [#RST#0]  98.5,21.87 0 top
U$253  [ORDERING_INSTRUCTIONS]  129.54,60.2 0 top
U$254  [ESP32_THING_PLUS0]  106.81,62.48 0 top
U$255  [SDA0]  101.6,60.2 0 top
U$256  [SCL0]  101.6,57.66 0 top
U$257  [140]  101.6,55.12 0 top
U$258  [320]  101.6,52.58 0 top
U$259  [150]  101.6,50.04 0 top
U$260  [330]  101.6,47.5 0 top
U$261  [270]  101.6,44.96 0 top
U$262  [120]  101.6,42.42 0 top
U$263  [130]  101.6,39.88 0 top
U$264  [130]  104.37,38.58 0 top
U$265  [VUSB0]  102.08,37.34 0 top
U$266  [EN0]  101.6,34.82 0 top
U$267  [VBAT0]  102.39,32.13 0 top
U$268  [CHG0]  116.84,15.11 90 top
U$269  [RESET0]  116.43,23.6 0 top
U$270  [3V30]  121.92,24.64 0 top
U$271  [NC0]  121.92,27.18 0 top
U$272  [GND0]  121.92,29.72 0 top
U$273  [A00]  121.92,32.26 0 top
U$274  [A10]  121.92,34.8 0 top
U$275  [A20]  121.92,37.34 0 top
U$276  [A30]  121.92,39.88 0 top
U$277  [A40]  121.92,42.42 0 top